# Altium PCB Tigershark 3D R2.2.PcbDoc (part 1 of 4)
Units mil, origin at the board's own origin, x right, y up, seen from the top; angles counter-clockwise.
Board outline 4100 x 4050 mil, 4 copper layers (Top Layer, Groun Plane, Power Plane, Bottom Layer), stack 61.73 mil thick; 359 components, 238 nets, 1141 pads, 830 vias.
Unrouted connection lines stored in the file: 3.
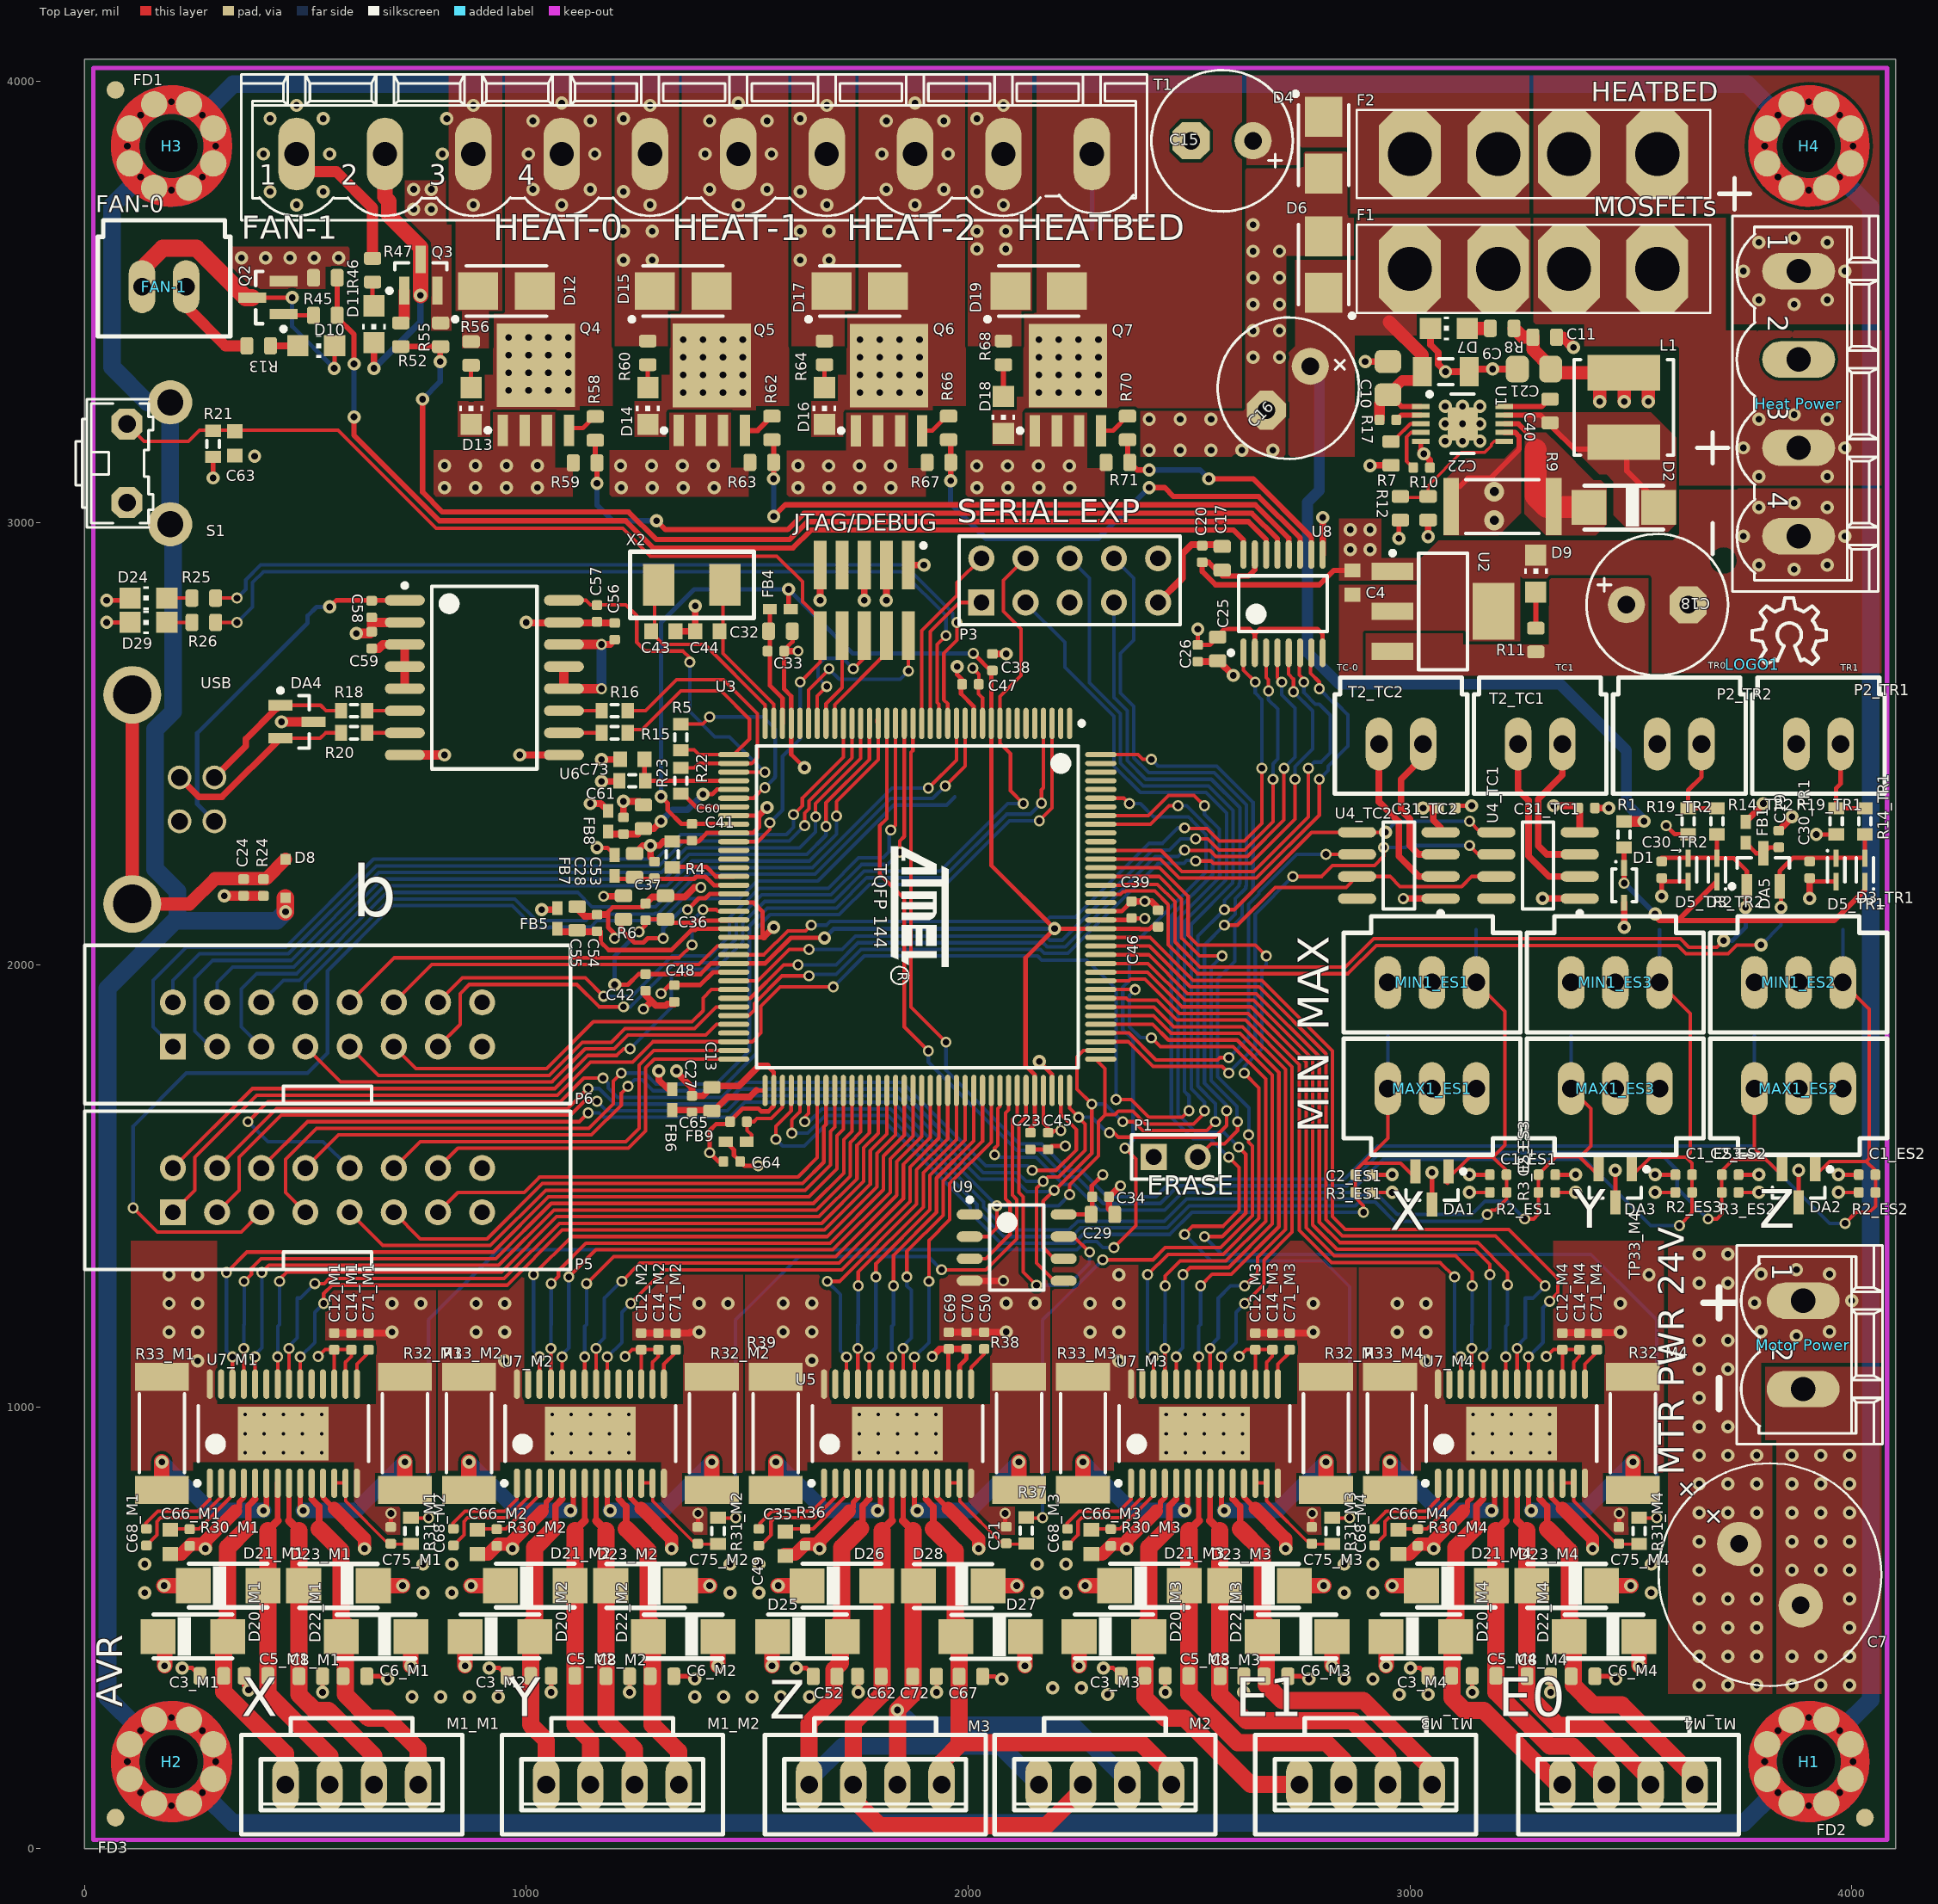
[diagram p0: Top Layer view]
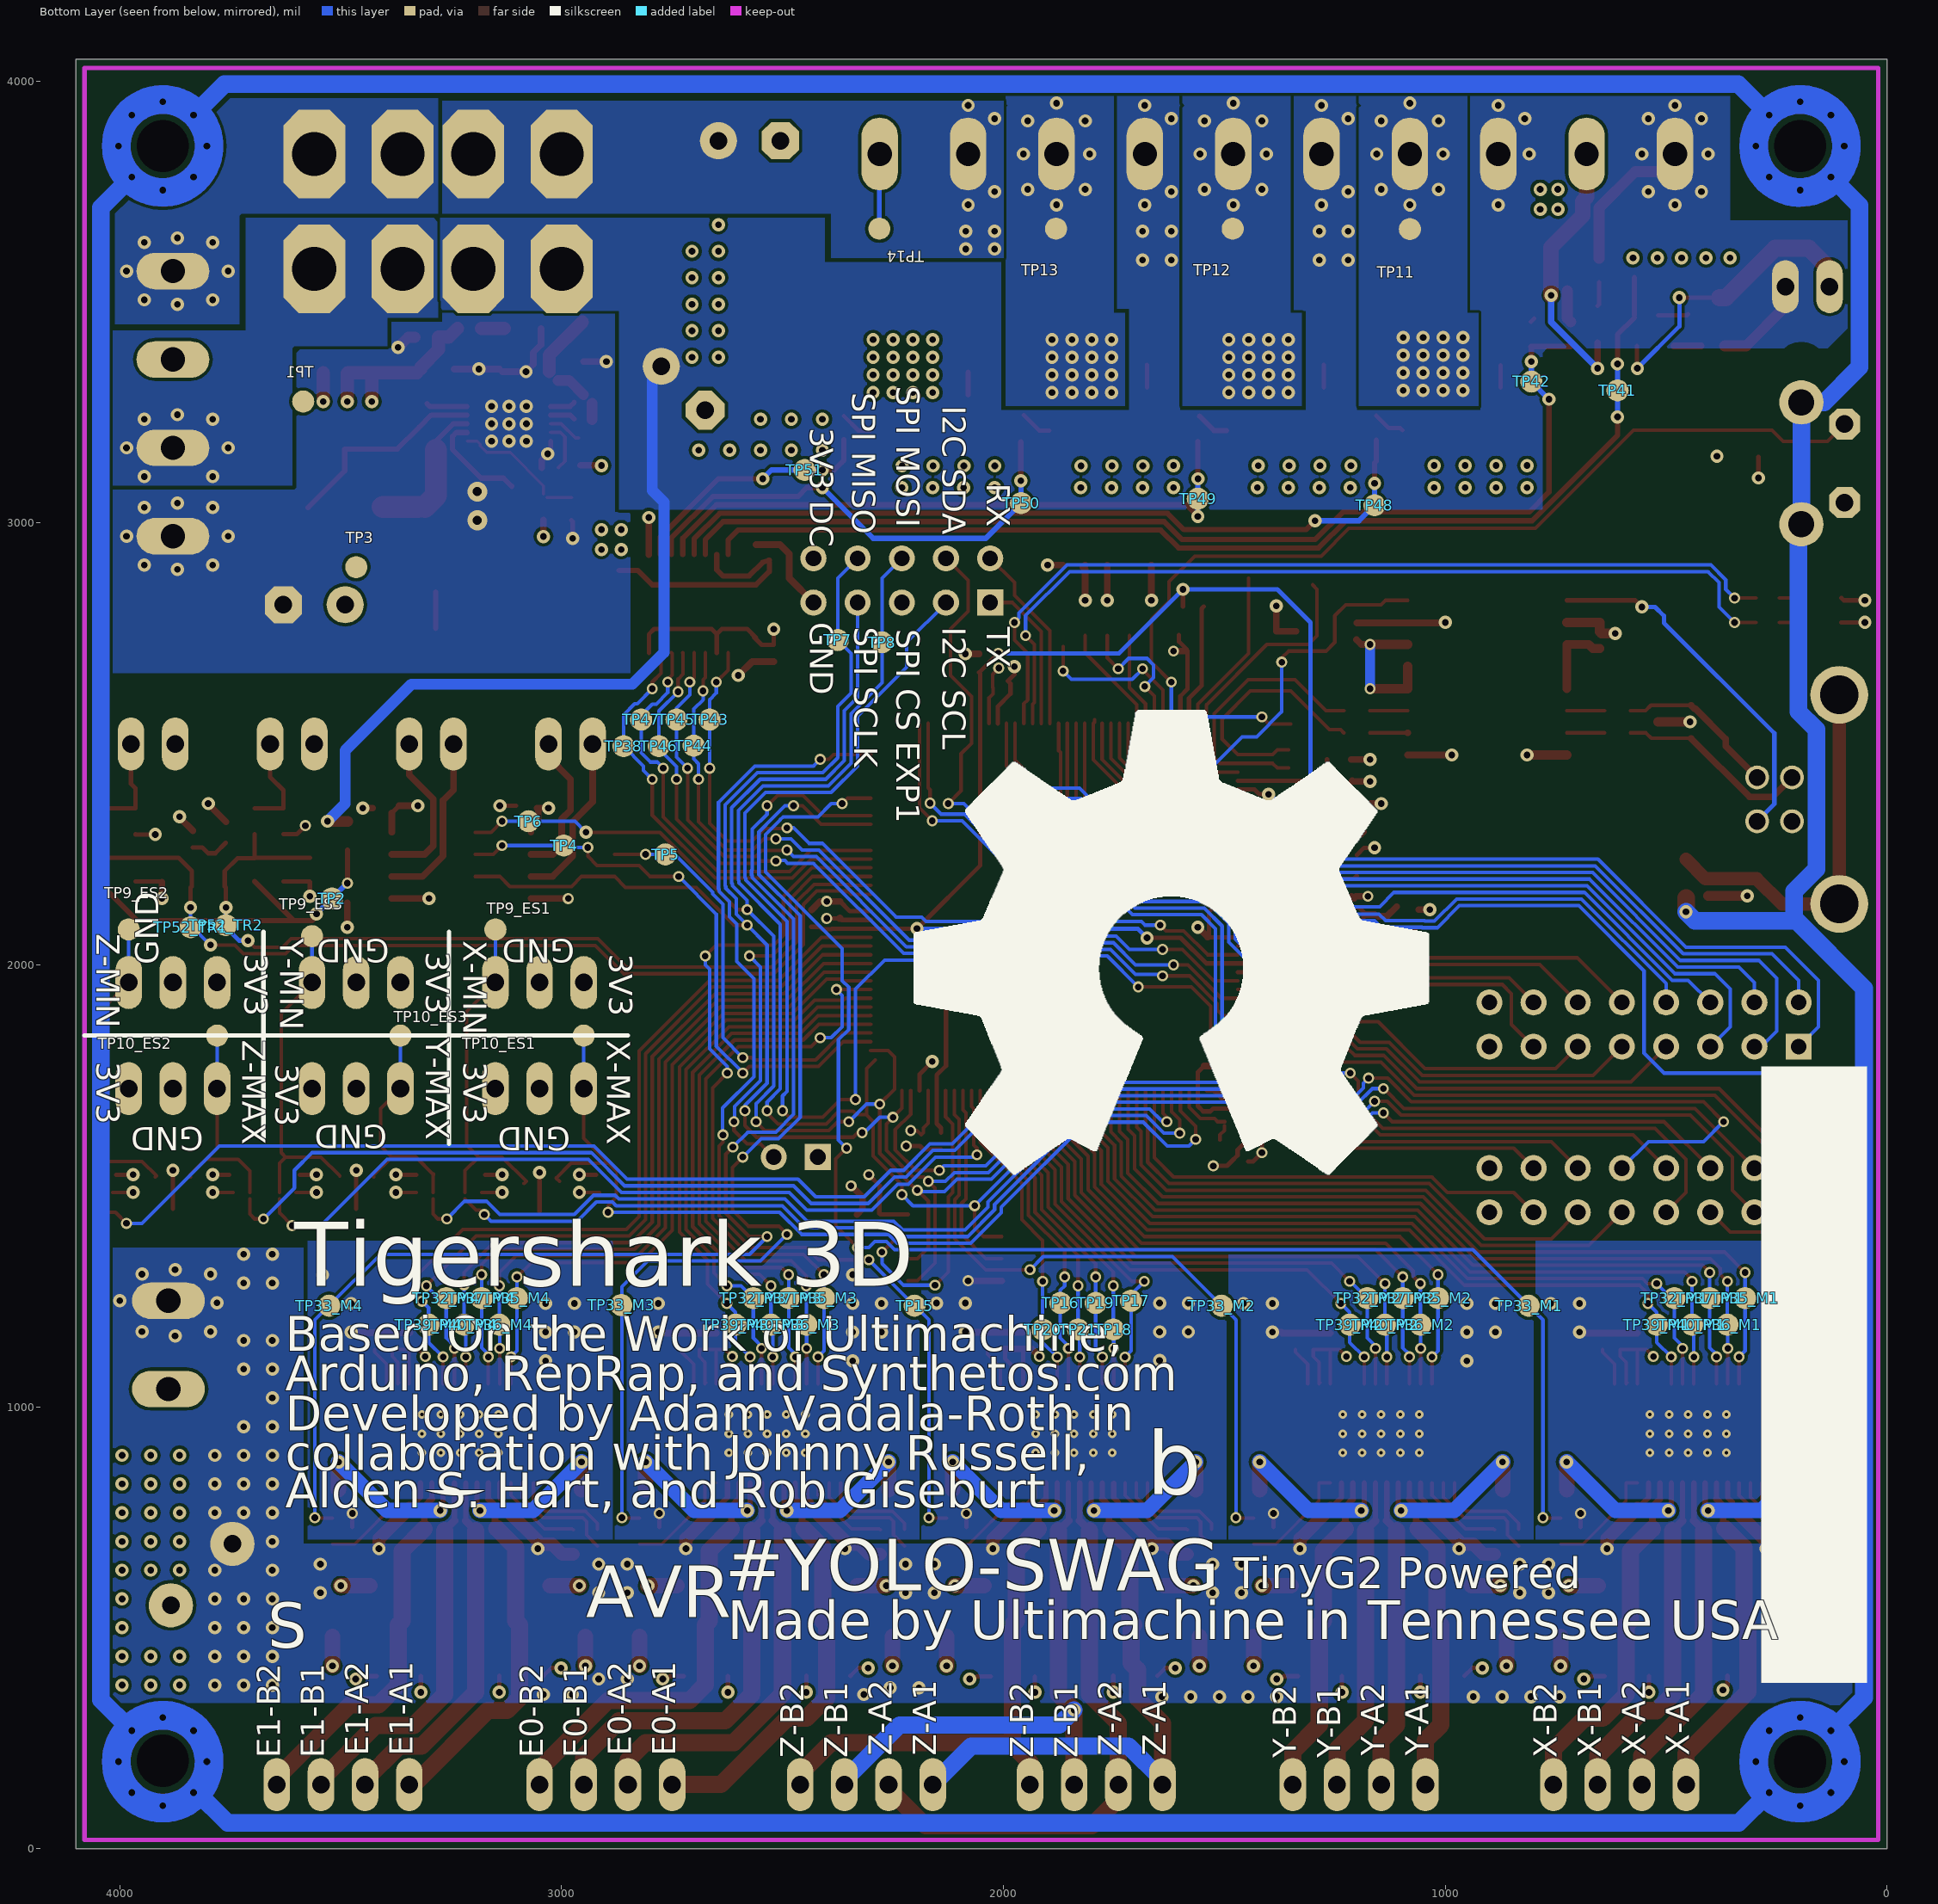
[diagram p1: Bottom Layer view, seen from below]
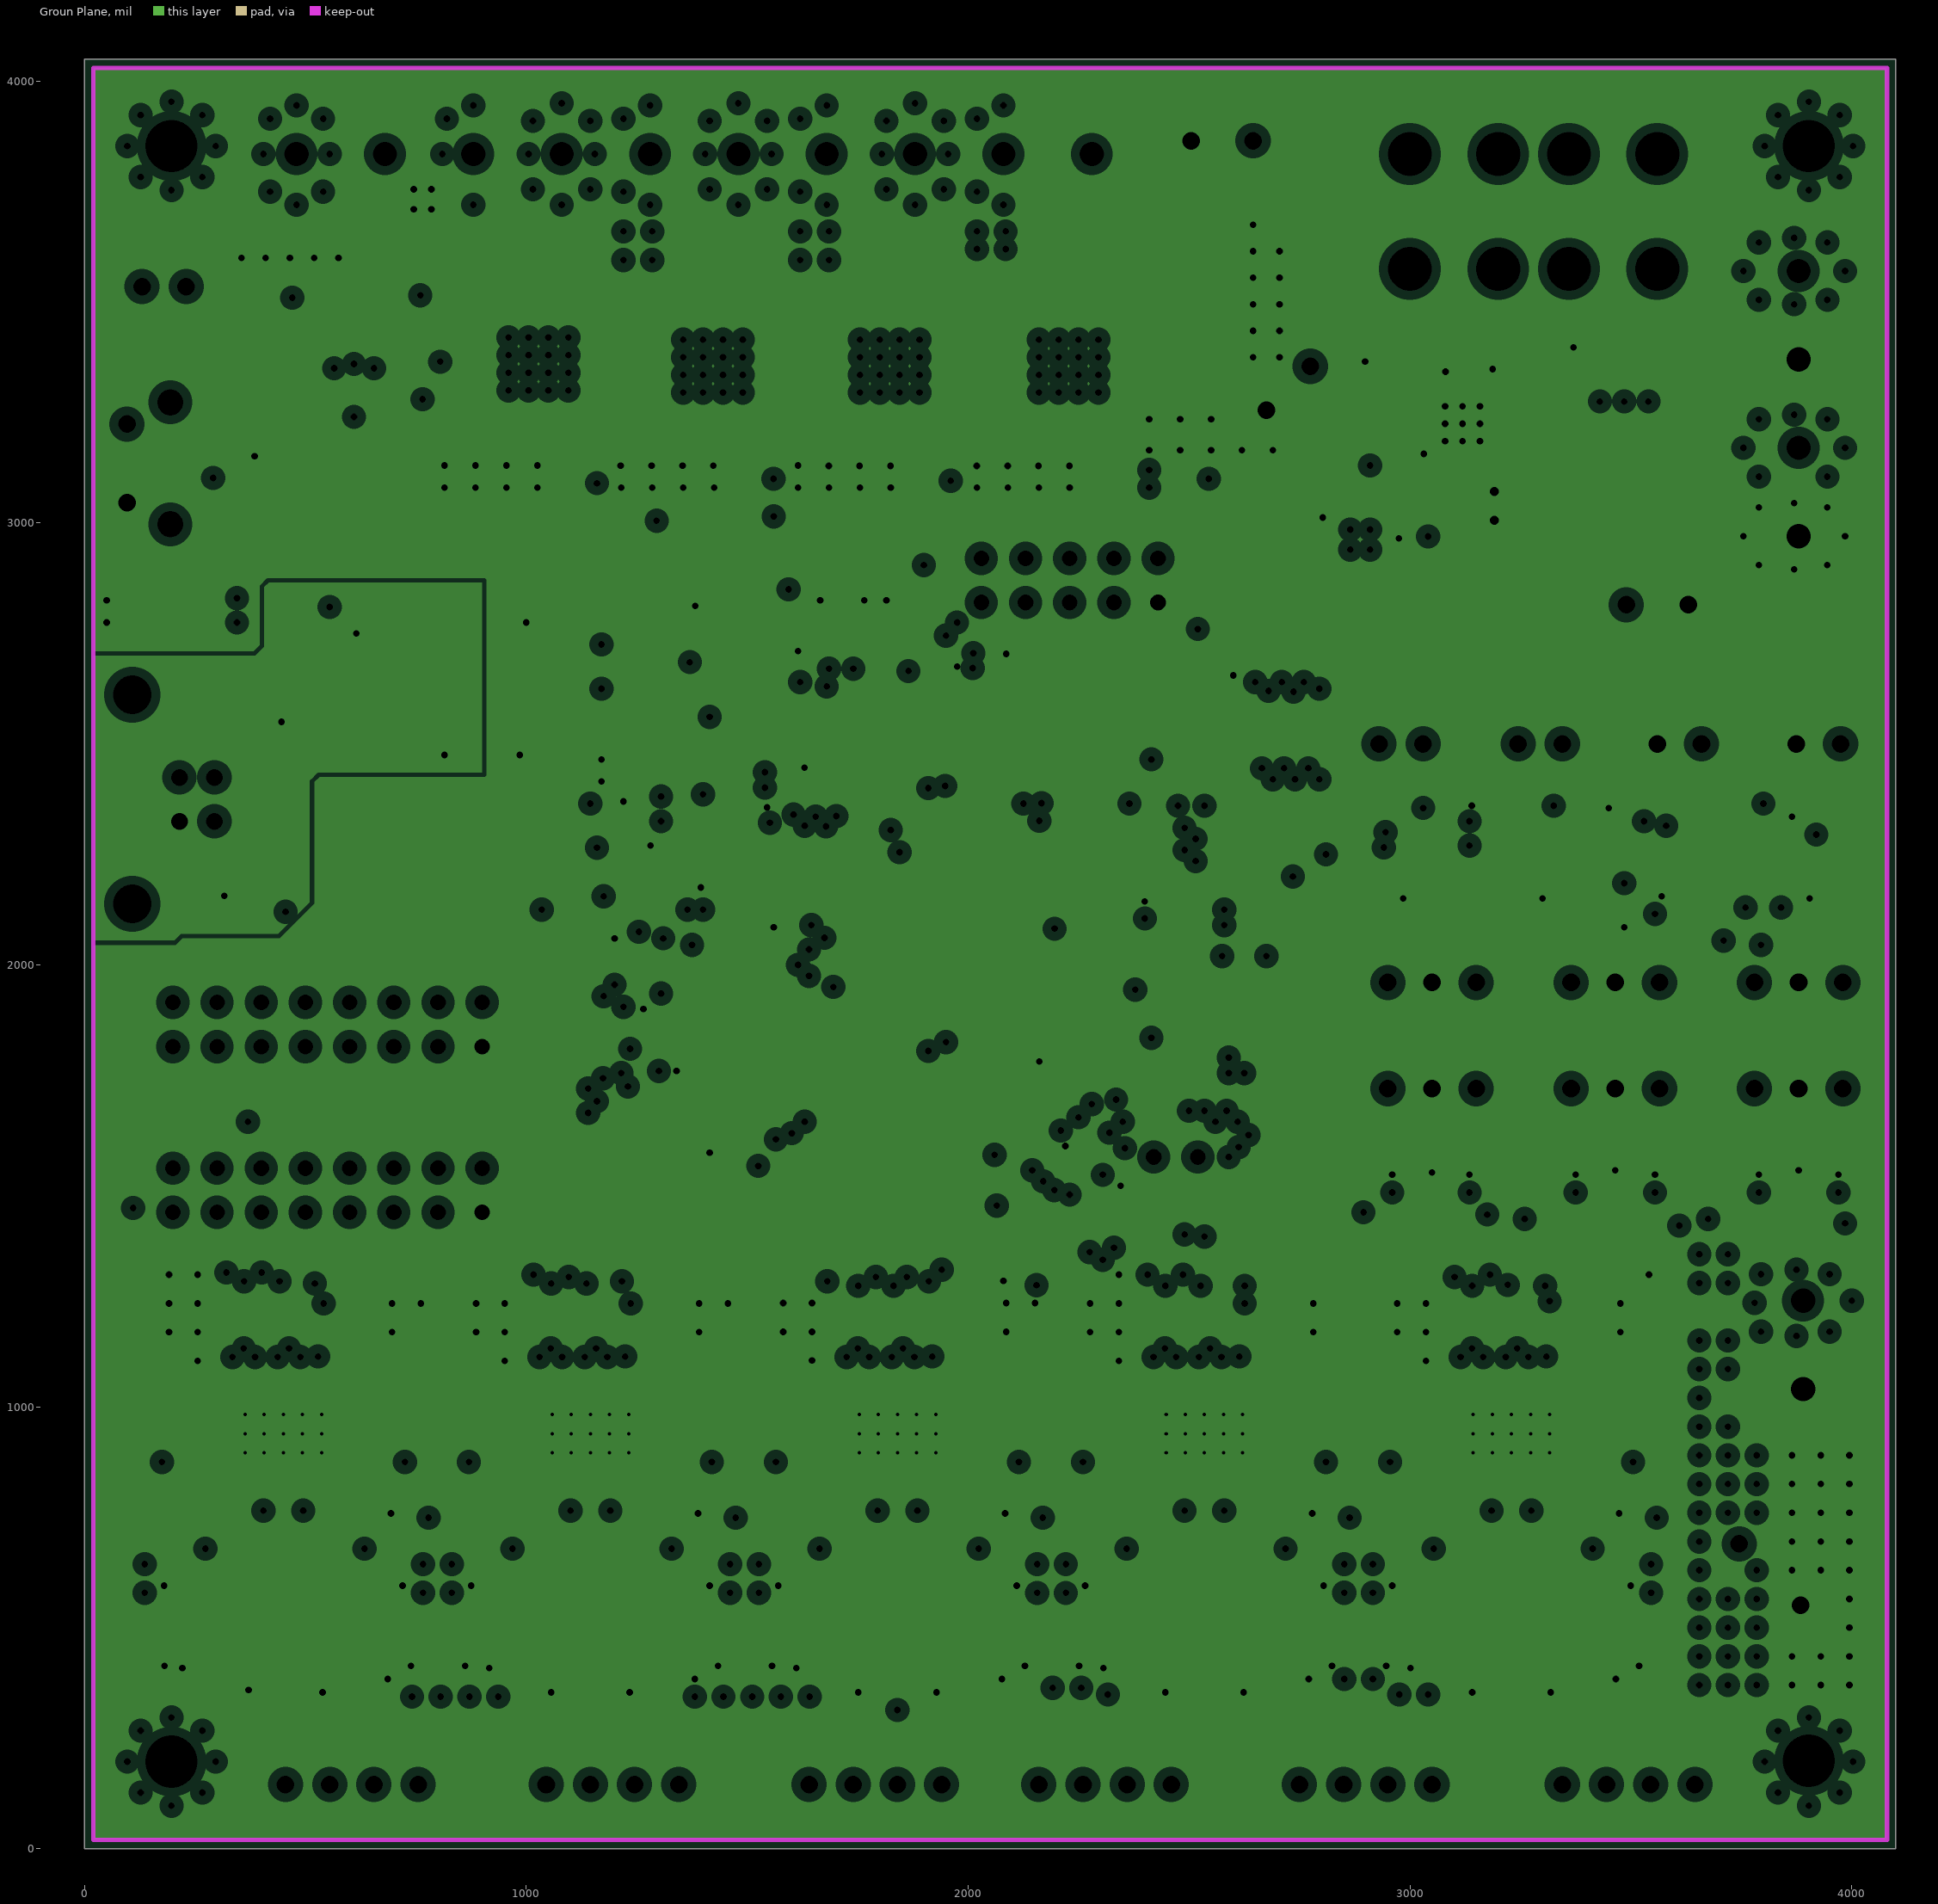
[diagram p2: Groun Plane, clearances drawn from the general rule]
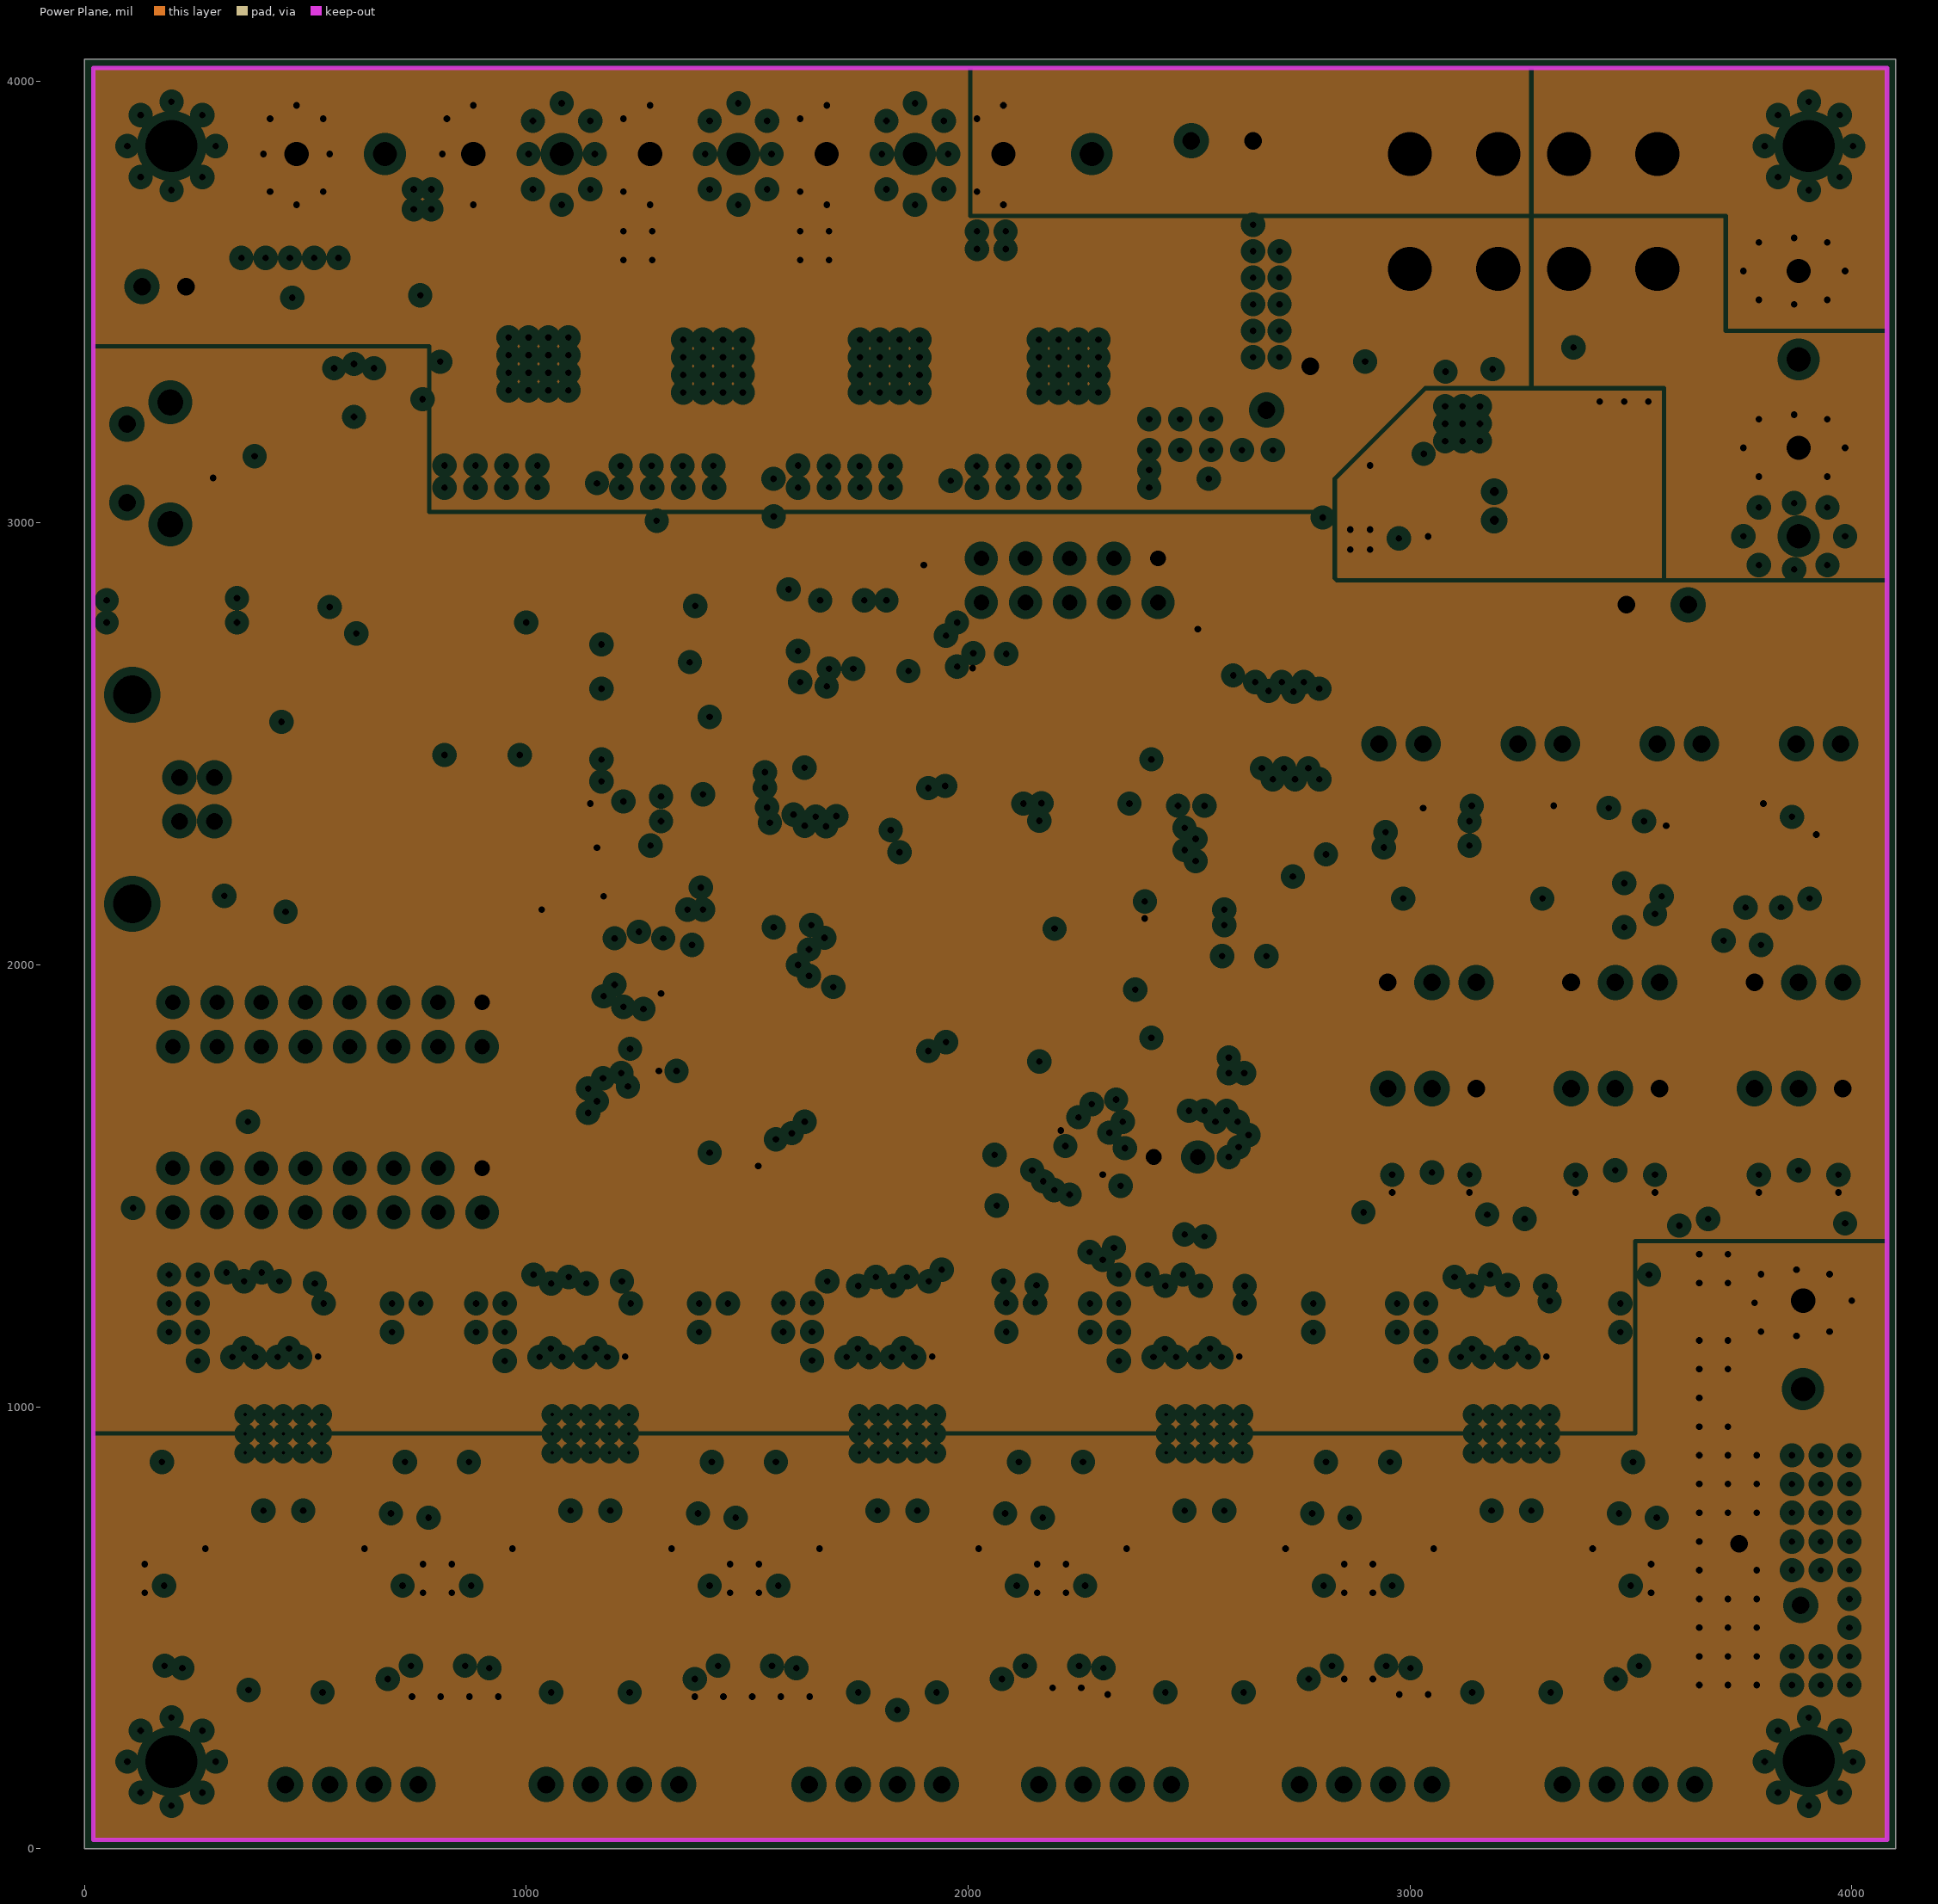
[diagram p3: Power Plane, clearances drawn from the general rule]

## Layer stack, top to bottom
Top Solder: solder mask 0.4, Solder Resist, Dk 3.5
Top Layer: signal copper 2.75
Dielectric1: prepreg 21.654, FR-4, Dk 4.2
Groun Plane: plane copper 1.4, net (Multiple Nets)
Dielectric2: core 10.236, FR-4, Dk 4.2
Power Plane: plane copper 1.4, net (Multiple Nets)
Dielectric3: prepreg 21.54, FR-4, Dk 4.2
Bottom Layer: signal copper 2.75
Bottom Solder: solder mask 0.4, Solder Resist, Dk 3.5

## Board outline
0,0 4100,0 4100,4050 0,4050

## Design rules (kind name [scope] priority, off if disabled: settings)
Clearance [All] p1: gap=7
ComponentClearance [All] p1: gap=0 collisioncheckmode=3 verticalgap=10 showdistances=FALSE
DiffPairsRouting [All] p1: maxlimit=10 minlimit=10 mostfreqgap=10 toplayer_minwidth=15 toplayer_maxwidth=15 toplayer_prefwidth=15 bottomlayer_minwidth=15 bottomlayer_maxwidth=15 bottomlayer_prefwidth=15 maxuncoupledlength=500
FanoutControl Fanout_SOIC [(InComponent('U8') AND InComponent('U7'))] p3: bgadir=Out bgaviamode=Centered fanoutstyle=Staggered fanoutdirection=Alternating viagrid=1 // Fanout_SOIC (Default Rule)
FanoutControl Fanout_Small [All] p4: bgadir=Out bgaviamode=Centered fanoutstyle=Auto fanoutdirection=Alternating viagrid=1 // Fanout_Small (Default Rule)
HoleSize [All] p1: absolutevalues=TRUE maxlimit=200 minlimit=15 maxpercent=80.000 minpercent=20.000
MinimumSolderMaskSliver [All] p1 off: minsoldermaskwidth=10
PlaneClearance [All] p1: clearance=20
PlaneConnect [All] p1: planeconnectstyle=Direct reliefexpansion=20 reliefentries=4 reliefconductorwidth=10 reliefairgap=10
PolygonConnect [All] p1: connectstyle=Direct reliefconductorwidth=45 reliefentries=4 polygonreliefangle="90 Angle" airgapwidth=10
RoutingVias [All] p1: holewidth=15 width=25 viastyle="Through Hole" minholewidth=15 minwidth=25 maxholewidth=28 maxwidth=50
SilkToSilkClearance [All] p1 off: silktosilkclearance=10
SilkToSolderMaskClearance SilkscreenOverComponentPads [IsPad] p1 off: minsilkscreentomaskgap=10 clearancetoexposedcopper=TRUE
SolderMaskExpansion [All] p1: expansion=4
UnpouredPolygon [All] p1: allowunpoured=FALSE
Width [All] p1: maxlimit=200 minlimit=7 preferedwidth=8 minimp=50.000000 maximp=50.000000 favimp=50.000000
19 further rules are at their usual default settings.

## Classes and differential pairs
net class R26_Nets: NetD29_A USB_TX
net class R25_Nets: NetD24_A USB_RX
net class D29_Nets: GND NetD29_A
net class D24_Nets: GND NetD24_A
net class U9_Nets: 3.3VCC GND HOLD# MISO MOSI SCLK SPIFLASH_CS WP#
net class C29_Nets: 3.3VCC GND
net class C34_Nets: 3.3VCC GND
net class P4_Nets: 3.3VCC GND GPIO_P_0 GPIO_P_1 GPIO_P_2 GPIO_P_3 GPIO_P_4 GPIO_P_5 NetP4_1 NetP4_3 NetP4_5
net class H4_Nets: FGND
net class H3_Nets: FGND
net class H2_Nets: FGND
net class H1_Nets: FGND
net class C16_Nets: +12VCC2 GND
net class C18_Nets: 3.3VCC GND
net class C15_Nets: +12VCC3 GND
net class C7_Nets: +12VCC1 GND
net class C14_M4_Nets: 3.3VCC GND
net class C14_M3_Nets: 3.3VCC GND
net class C14_M2_Nets: 3.3VCC GND
net class C14_M1_Nets: 3.3VCC GND
net class C12_M4_Nets: 3.3VCC GND
net class C12_M3_Nets: 3.3VCC GND
net class C12_M2_Nets: 3.3VCC GND
net class C12_M1_Nets: 3.3VCC GND
net class X2_Nets: NetC43_2 NetC44_2
net class USB_Nets: INPUT_GND NetC24_2 NetC58_2 R_N R_P
net class U8_Nets: 3.3VCC +5VCC BED_PWM FET_PWM1 FET_PWM2 FET_PWM3 FET_PWM4 FET_PWM5 GND NetR45_1 NetR52_1 NetR58_1 NetR62_1 NetR66_1 NetR70_1
net class U7_M4_Nets: 3.3VCC +12VCC1 DIR4 EN4 GND MOD0E4 MOD1E4 MOD2E4 NetC3_M4_1 NetC5_M4_1 NetC6_M4_1 NetC8_M4_1 NetC66_M4_2 NetC68_M4_1 NetC68_M4_2 NetC71_M4_2 NetC75_M4_2 NetR32_M4_2 NetR33_M4_2 NetU7_M4_18 NetU7_M4_19 NetU7_M4_27 STEP4
net class U7_M3_Nets: 3.3VCC +12VCC1 DIR3 EN3 GND MOD0E3 MOD1E3 MOD2E3 NetC3_M3_1 NetC5_M3_1 NetC6_M3_1 NetC8_M3_1 NetC66_M3_2 NetC68_M3_1 NetC68_M3_2 NetC71_M3_2 NetC75_M3_2 NetR32_M3_2 NetR33_M3_2 NetU7_M3_18 NetU7_M3_19 NetU7_M3_27 STEP3
net class U7_M2_Nets: 3.3VCC +12VCC1 DIR2 EN2 GND MOD0E2 MOD1E2 MOD2E2 NetC3_M2_1 NetC5_M2_1 NetC6_M2_1 NetC8_M2_1 NetC66_M2_2 NetC68_M2_1 NetC68_M2_2 NetC71_M2_2 NetC75_M2_2 NetR32_M2_2 NetR33_M2_2 NetU7_M2_18 NetU7_M2_19 NetU7_M2_27 STEP2
net class U7_M1_Nets: 3.3VCC +12VCC1 DIR1 EN1 GND MOD0E1 MOD1E1 MOD2E1 NetC3_M1_1 NetC5_M1_1 NetC6_M1_1 NetC8_M1_1 NetC66_M1_2 NetC68_M1_1 NetC68_M1_2 NetC71_M1_2 NetC75_M1_2 NetR32_M1_2 NetR33_M1_2 NetU7_M1_18 NetU7_M1_19 NetU7_M1_27 STEP1
net class U6_Nets: GND INPUT_GND NetC56_2 NetC58_2 NetC59_2 UD_N UD_P UI_N UI_P VBUS
net class U4_TC2_Nets: 3.3VCC GND MISO NetT2_TC2_1 NetT2_TC2_2 NetU4_TC2_8 SCLK TC_CS2
net class U4_TC1_Nets: 3.3VCC GND MISO NetT2_TC1_1 NetT2_TC1_2 NetU4_TC1_8 SCLK TC_CS1
net class U3_Nets: 3.3VCC AVREF BED_PWM DIR1 DIR2 DIR3 DIR4 DIR_EXP1 DIR_EXP2 DIR_Z EN1 EN2 EN3 EN4 EN_EXP1 EN_EXP2 EN_Z ERASE FET_PWM1 FET_PWM2 FET_PWM3 FET_PWM4 FET_PWM5 GND HOLD# I2C_SCL I2C_SDA MAX_ES1 MAX_ES2 MAX_ES3 MCCDZ MCCK MCDZ0 MCDZ1 MCDZ2 MCDZ3 MIN_ES1 MIN_ES2 MIN_ES3 MISO MOD0E1 MOD0E2 MOD0E3 MOD0E4 MOD0E_Z MOD1E1 MOD1E2 MOD1E3 MOD1E4 MOD1E_Z MOD2E1 MOD2E2 MOD2E3 MOD2E4 MOD2E_Z MODE0_EXP1 MODE0_EXP2 MODE1_EXP1 MODE1_EXP2 MODE2_EXP1 MODE2_EXP2 MOSI NetC43_2 NetC44_2 NetC73_2 NetR4_1 NetR5_2 NetR6_1 NetR22_2 NetU3_32 NetU3_48 NetU3_127 NetU3_136 NetU3_137 NetU3_138 NRST REF1 REF2 REF3 REF4 REF_EXP1 REF_EXP2 REF_Z RESET RXD0 RXD1 SCLK SHDN STEP1 STEP2 STEP3 STEP4 STEP_EXP1 STEP_EXP2 STEP_Z TC_CS1 TC_CS2 TCK/SWDCLK TDI TDO/SWO THERM_AN1 THERM_AN2 TMS/SWDIO TXD0 TXD1 UMCU_N UMCU_P USB_RX USB_TX VBUS VDDANA VDDBU VDDIN VDDOUT VDDPLL VDDUTMI WP# XIN32 XOUT32
net class U2_Nets: 3.3VCC +5VCC GND
net class U1_Nets: +12VCC2 GND NetC22_1 NetC40_1 NetC40_2 NetD2_A NetR7_1 NetR10_2 NetR17_1
net class TP52_TR2_Nets: THERM_AN2
net class TP52_TR1_Nets: THERM_AN1
net class TP51_Nets: NetR70_1
net class TP50_Nets: NetR66_1
net class TP49_Nets: NetR62_1
net class TP48_Nets: NetR58_1
net class TP47_Nets: FET_PWM5
net class TP46_Nets: FET_PWM4
net class TP45_Nets: FET_PWM3
net class TP44_Nets: FET_PWM2
net class TP43_Nets: FET_PWM1
net class TP42_Nets: NetR52_1
net class TP41_Nets: NetR45_1
net class TP40_M4_Nets: STEP4
net class TP40_M3_Nets: STEP3
net class TP40_M2_Nets: STEP2
net class TP40_M1_Nets: STEP1
net class TP39_M4_Nets: DIR4
net class TP39_M3_Nets: DIR3
net class TP39_M2_Nets: DIR2
net class TP39_M1_Nets: DIR1
net class TP38_Nets: BED_PWM
net class TP37_M4_Nets: MOD0E4
net class TP37_M3_Nets: MOD0E3
net class TP37_M2_Nets: MOD0E2
net class TP37_M1_Nets: MOD0E1
net class TP36_M4_Nets: MOD1E4
net class TP36_M3_Nets: MOD1E3
net class TP36_M2_Nets: MOD1E2
net class TP36_M1_Nets: MOD1E1
net class TP35_M4_Nets: MOD2E4
net class TP35_M3_Nets: MOD2E3
net class TP35_M2_Nets: MOD2E2
net class TP35_M1_Nets: MOD2E1
net class TP33_M4_Nets: REF4
net class TP33_M3_Nets: REF3
net class TP33_M2_Nets: REF2
net class TP33_M1_Nets: REF1
net class TP32_M4_Nets: EN4
net class TP32_M3_Nets: EN3
net class TP32_M2_Nets: EN2
net class TP32_M1_Nets: EN1
net class TP14_Nets: NetD18_C
net class TP13_Nets: NetD16_C
net class TP12_Nets: NetD14_C
net class TP11_Nets: NetD12_1
net class TP10_ES3_Nets: MAX_ES3
net class TP10_ES2_Nets: MAX_ES2
net class TP10_ES1_Nets: MAX_ES1
net class TP9_ES3_Nets: MIN_ES3
net class TP9_ES2_Nets: MIN_ES2
net class TP9_ES1_Nets: MIN_ES1
net class TP8_Nets: MOSI
net class TP7_Nets: MISO
net class TP6_Nets: SCLK
net class TP5_Nets: TC_CS2
net class TP4_Nets: TC_CS1
net class TP3_Nets: 3.3VCC
net class TP2_Nets: OVREF
net class TP1_Nets: +5VCC
net class T2_TC2_Nets: NetT2_TC2_1 NetT2_TC2_2
net class T2_TC1_Nets: NetT2_TC1_1 NetT2_TC1_2
net class T1_Nets: +12VCC2 +12VCC3 NetD11_C NetD12_1 NetD14_C NetD16_C NetD18_C
net class S1_Nets: FGND GND NetS1_3 NetS1_4 RESET
net class R71_Nets: GND NetR70_1
net class R70_Nets: NetQ7_4 NetR70_1
net class R68_Nets: +12VCC3 NetD18_A
net class R67_Nets: GND NetR66_1
net class R66_Nets: NetQ6_4 NetR66_1
net class R64_Nets: +12VCC2 NetD16_A
net class R63_Nets: GND NetR62_1
net class R62_Nets: NetQ5_4 NetR62_1
net class R60_Nets: +12VCC2 NetD14_A
net class R59_Nets: GND NetR58_1
net class R58_Nets: NetQ4_4 NetR58_1
net class R56_Nets: +12VCC2 NetD13_A
net class R55_Nets: GND NetR52_1
net class R52_Nets: NetQ3_1 NetR52_1
net class R47_Nets: +12VCC2 NetD11_A
net class R46_Nets: GND NetR45_1
net class R45_Nets: NetQ2_1 NetR45_1
net class R33_M4_Nets: GND NetR33_M4_2
net class R33_M3_Nets: GND NetR33_M3_2
net class R33_M2_Nets: GND NetR33_M2_2
net class R33_M1_Nets: GND NetR33_M1_2
net class R32_M4_Nets: GND NetR32_M4_2
net class R32_M3_Nets: GND NetR32_M3_2
net class R32_M2_Nets: GND NetR32_M2_2
net class R32_M1_Nets: GND NetR32_M1_2
net class R31_M4_Nets: NetC75_M4_2 REF4
net class R31_M3_Nets: NetC75_M3_2 REF3
net class R31_M2_Nets: NetC75_M2_2 REF2
net class R31_M1_Nets: NetC75_M1_2 REF1
net class R30_M4_Nets: +12VCC1 NetC66_M4_2
net class R30_M3_Nets: +12VCC1 NetC66_M3_2
net class R30_M2_Nets: +12VCC1 NetC66_M2_2
net class R30_M1_Nets: +12VCC1 NetC66_M1_2
net class R23_Nets: GND NetC73_2
net class R22_Nets: NetR22_2 UMCU_N
net class R21_Nets: 3.3VCC RESET
net class R20_Nets: R_P UD_P
net class R19_TR2_Nets: 3.3VCC NetP2_TR2_1
net class R19_TR1_Nets: 3.3VCC NetP2_TR1_1
net class R18_Nets: R_N UD_N
net class R17_Nets: +12VCC2 NetR17_1
net class R16_Nets: UI_N UMCU_N
net class R15_Nets: UI_P UMCU_P
net class R14_TR2_Nets: NetP2_TR2_1 THERM_AN2
net class R14_TR1_Nets: NetP2_TR1_1 THERM_AN1
net class R13_Nets: +12VCC2 NetD10_A
net class R12_Nets: GND NetR10_2
net class R11_Nets: 3.3VCC NetD9_A
net class R10_Nets: +5VCC NetR10_2
net class R9_Nets: GND NetD2_A
net class R8_Nets: +5VCC NetD7_A
net class R7_Nets: +5VCC NetR7_1
net class R6_Nets: 3.3VCC NetR6_1
net class R5_Nets: NetR5_2 UMCU_P
net class R4_Nets: GND NetR4_1
net class R3_ES3_Nets: 3.3VCC MAX_ES3
net class R3_ES2_Nets: 3.3VCC MAX_ES2
net class R3_ES1_Nets: 3.3VCC MAX_ES1
net class R2_ES3_Nets: 3.3VCC MIN_ES3
net class R2_ES2_Nets: 3.3VCC MIN_ES2
net class R2_ES1_Nets: 3.3VCC MIN_ES1
net class R1_Nets: +12VCC2 OVREF
net class Q7_Nets: GND NetD18_C NetQ7_4
net class Q6_Nets: GND NetD16_C NetQ6_4
net class Q5_Nets: GND NetD14_C NetQ5_4
net class Q4_Nets: GND NetD12_1 NetQ4_4
net class Q3_Nets: GND NetD11_C NetQ3_1
net class Q2_Nets: GND NetD10_C NetQ2_1
net class P2_TR2_Nets: GND NetP2_TR2_1
net class P2_TR1_Nets: GND NetP2_TR1_1
net class P1_Nets: 3.3VCC ERASE
net class "Motor Power_Nets": +12VCC1 GND
net class MIN1_ES3_Nets: 3.3VCC GND MIN_ES3
net class MIN1_ES2_Nets: 3.3VCC GND MIN_ES2
net class MIN1_ES1_Nets: 3.3VCC GND MIN_ES1
net class MAX1_ES3_Nets: 3.3VCC GND MAX_ES3
net class MAX1_ES2_Nets: 3.3VCC GND MAX_ES2
net class MAX1_ES1_Nets: 3.3VCC GND MAX_ES1
net class M1_M4_Nets: NetC3_M4_1 NetC5_M4_1 NetC6_M4_1 NetC8_M4_1
net class M1_M3_Nets: NetC3_M3_1 NetC5_M3_1 NetC6_M3_1 NetC8_M3_1
net class M1_M2_Nets: NetC3_M2_1 NetC5_M2_1 NetC6_M2_1 NetC8_M2_1
net class M1_M1_Nets: NetC3_M1_1 NetC5_M1_1 NetC6_M1_1 NetC8_M1_1
net class L1_Nets: +5VCC NetC40_2
net class JTAG/DEBUG_Nets: 3.3VCC GND NetJTAG/DEBUG_7 RESET TCK/SWDCLK TDI TDO/SWO TMS/SWDIO
net class "Heat Power_Nets": GND NetF1_1 NetF2_1
net class FB9_Nets: 3.3VCC AVREF
net class FB8_Nets: 3.3VCC VDDUTMI
net class FB7_Nets: 3.3VCC VDDBU
net class FB6_Nets: 3.3VCC VDDANA
net class FB5_Nets: 3.3VCC VDDIN
net class FB4_Nets: VDDOUT VDDPLL
net class FAN-1_Nets: +12VCC2 NetD10_C
net class F2_Nets: +12VCC3 NetF2_1
net class F1_Nets: +12VCC2 NetF1_1
net class DA5_Nets: NetC19_2 THERM_AN1 THERM_AN2
net class DA4_Nets: INPUT_GND R_N R_P
net class DA3_Nets: GND MAX_ES3 MIN_ES3
net class DA2_Nets: GND MAX_ES2 MIN_ES2
net class DA1_Nets: GND MAX_ES1 MIN_ES1
net class D23_M4_Nets: GND NetC8_M4_1
net class D23_M3_Nets: GND NetC8_M3_1
net class D23_M2_Nets: GND NetC8_M2_1
net class D23_M1_Nets: GND NetC8_M1_1
net class D22_M4_Nets: GND NetC6_M4_1
net class D22_M3_Nets: GND NetC6_M3_1
net class D22_M2_Nets: GND NetC6_M2_1
net class D22_M1_Nets: GND NetC6_M1_1
net class D21_M4_Nets: GND NetC5_M4_1
net class D21_M3_Nets: GND NetC5_M3_1
net class D21_M2_Nets: GND NetC5_M2_1
net class D21_M1_Nets: GND NetC5_M1_1
net class D20_M4_Nets: GND NetC3_M4_1
net class D20_M3_Nets: GND NetC3_M3_1
net class D20_M2_Nets: GND NetC3_M2_1
net class D20_M1_Nets: GND NetC3_M1_1
net class D19_Nets: +12VCC3 NetD18_C
net class D18_Nets: NetD18_A NetD18_C
net class D17_Nets: +12VCC2 NetD16_C
net class D16_Nets: NetD16_A NetD16_C
net class D15_Nets: +12VCC2 NetD14_C
net class D14_Nets: NetD14_A NetD14_C
net class D13_Nets: NetD12_1 NetD13_A
net class D12_Nets: +12VCC2 NetD12_1
net class D11_Nets: NetD11_A NetD11_C
net class D10_Nets: NetD10_A NetD10_C
net class D9_Nets: GND NetD9_A
net class D7_Nets: GND NetD7_A
net class D6_Nets: +12VCC2 GND
net class D5_TR2_Nets: GND THERM_AN2
net class D5_TR1_Nets: GND THERM_AN1
net class D4_Nets: +12VCC3 GND
net class D3_TR2_Nets: OVREF THERM_AN2
net class D3_TR1_Nets: OVREF THERM_AN1
net class D2_Nets: NetC40_2 NetD2_A
net class D1_Nets: GND OVREF
net class C75_M4_Nets: GND NetC75_M4_2
net class C75_M3_Nets: GND NetC75_M3_2
net class C75_M2_Nets: GND NetC75_M2_2
net class C75_M1_Nets: GND NetC75_M1_2
net class C73_Nets: GND NetC73_2
net class C71_M4_Nets: GND NetC71_M4_2
net class C71_M3_Nets: GND NetC71_M3_2
net class C71_M2_Nets: GND NetC71_M2_2
net class C71_M1_Nets: GND NetC71_M1_2
net class C68_M4_Nets: NetC68_M4_1 NetC68_M4_2
net class C68_M3_Nets: NetC68_M3_1 NetC68_M3_2
net class C68_M2_Nets: NetC68_M2_1 NetC68_M2_2
net class C68_M1_Nets: NetC68_M1_1 NetC68_M1_2
net class C66_M4_Nets: +12VCC1 NetC66_M4_2
net class C66_M3_Nets: +12VCC1 NetC66_M3_2
net class C66_M2_Nets: +12VCC1 NetC66_M2_2
net class C66_M1_Nets: +12VCC1 NetC66_M1_2
net class C65_Nets: AVREF GND
net class C64_Nets: 3.3VCC GND
net class C63_Nets: GND RESET
net class C61_Nets: GND VDDUTMI
net class C60_Nets: GND VDDUTMI
net class C59_Nets: INPUT_GND NetC59_2
net class C58_Nets: INPUT_GND NetC58_2
net class C57_Nets: GND VBUS
net class C56_Nets: GND NetC56_2
net class C55_Nets: GND VDDIN
net class C54_Nets: GND VDDIN
net class C53_Nets: GND VDDBU
net class C48_Nets: 3.3VCC GND
net class C47_Nets: 3.3VCC GND
net class C46_Nets: 3.3VCC GND
net class C45_Nets: 3.3VCC GND
net class C44_Nets: GND NetC44_2
net class C43_Nets: GND NetC43_2
net class C42_Nets: GND VDDOUT
net class C41_Nets: GND VDDOUT
net class C40_Nets: NetC40_1 NetC40_2
net class C39_Nets: GND VDDOUT
net class C38_Nets: GND VDDOUT
net class C37_Nets: GND VDDOUT
net class C36_Nets: GND VDDOUT
net class C33_Nets: GND VDDPLL
net class C32_Nets: GND VDDPLL
net class C31_TC2_Nets: 3.3VCC GND
net class C31_TC1_Nets: 3.3VCC GND
net class C30_TR2_Nets: GND THERM_AN2
net class C30_TR1_Nets: GND THERM_AN1
net class C28_Nets: GND VDDBU
net class C27_Nets: GND VDDANA
net class C26_Nets: 3.3VCC GND
net class C25_Nets: 3.3VCC GND
net class C23_Nets: GND VDDOUT
net class C22_Nets: GND NetC22_1
net class C21_Nets: +5VCC GND
net class C20_Nets: +5VCC GND
net class C17_Nets: +5VCC GND
net class C13_Nets: GND VDDANA
net class C11_Nets: +5VCC GND
net class C10_Nets: +12VCC2 GND
net class C9_Nets: +12VCC2 GND
net class C8_M4_Nets: GND NetC8_M4_1
net class C8_M3_Nets: GND NetC8_M3_1
net class C8_M2_Nets: GND NetC8_M2_1
net class C8_M1_Nets: GND NetC8_M1_1
net class C6_M4_Nets: GND NetC6_M4_1
net class C6_M3_Nets: GND NetC6_M3_1
net class C6_M2_Nets: GND NetC6_M2_1
net class C6_M1_Nets: GND NetC6_M1_1
net class C5_M4_Nets: GND NetC5_M4_1
net class C5_M3_Nets: GND NetC5_M3_1
net class C5_M2_Nets: GND NetC5_M2_1
net class C5_M1_Nets: GND NetC5_M1_1
net class C4_Nets: +5VCC GND
net class C3_M4_Nets: GND NetC3_M4_1
net class C3_M3_Nets: GND NetC3_M3_1
net class C3_M2_Nets: GND NetC3_M2_1
net class C3_M1_Nets: GND NetC3_M1_1
net class C2_ES3_Nets: GND MAX_ES3
net class C2_ES2_Nets: GND MAX_ES2
net class C2_ES1_Nets: GND MAX_ES1
net class C1_ES3_Nets: GND MIN_ES3
net class C1_ES2_Nets: GND MIN_ES2
net class C1_ES1_Nets: GND MIN_ES1
component class "U_MOSFETs and Driver": C17 C20 C25 C26 D10 D11 D12 D13 D14 D15 D16 D17 D18 D19 FAN-1 Q2 Q3 Q4 Q5 Q6 Q7 R13 R45 R46 R47 R52 R55 R56 R58 R59 R60 R62 R63 R64 R66 R67 R68 R70 R71 T1 TP11 TP12 TP13 TP14 TP38 TP41 TP42 TP43 TP44 TP45 TP46 TP47 TP48 TP49 TP50 TP51 U8
component class TC2: C31_TC2 T2_TC2 U4_TC2 U4_ThermocoupleChannel2
component class TC1: C31_TC1 T2_TC1 U4_TC1 U4_ThermocoupleChannel1
component class ES3: C1_ES3 C2_ES3 MAX1_ES3 MIN1_ES3 R2_ES3 R3_ES3 TP9_ES3 TP10_ES3
component class ES2: C1_ES2 C2_ES2 MAX1_ES2 MIN1_ES2 R2_ES2 R3_ES2 TP9_ES2 TP10_ES2
component class ES1: C1_ES1 C2_ES1 MAX1_ES1 MIN1_ES1 R2_ES1 R3_ES1 TP9_ES1 TP10_ES1
component class U_MZ: C35 C49 C50 C51 C52 C62 C67 C69 C70 C72 D25 D26 D27 D28 M2 M3 R32_DriverChannelDRV88255 R33_DriverChannelDRV88255 R36 R37 R38 R39 TP15 TP16 TP17 TP18 TP19 TP20 TP21 U5
component class M4: C3_M4 C5_M4 C6_M4 C8_M4 C12_M4 C14_M4 C66_M4 C68_M4 C71_M4 C75_M4 D20_M4 D21_M4 D22_M4 D23_M4 M1_M4 R30_M4 R31_M4 R32_DriverChannelDRV88254 R32_M4 R33_DriverChannelDRV88254 R33_M4 TP32_M4 TP33_M4 TP35_M4 TP36_M4 TP37_M4 TP39_M4 TP40_M4 U7_M4
component class M3: C3_M3 C5_M3 C6_M3 C8_M3 C12_M3 C14_M3 C66_M3 C68_M3 C71_M3 C75_M3 D20_M3 D21_M3 D22_M3 D23_M3 M1_M3 R30_M3 R31_M3 R32_DriverChannelDRV88253 R32_M3 R33_DriverChannelDRV88253 R33_M3 TP32_M3 TP33_M3 TP35_M3 TP36_M3 TP37_M3 TP39_M3 TP40_M3 U7_M3
component class M2: C3_M2 C5_M2 C6_M2 C8_M2 C12_M2 C14_M2 C66_M2 C68_M2 C71_M2 C75_M2 D20_M2 D21_M2 D22_M2 D23_M2 M1_M2 R30_M2 R31_M2 R32_DriverChannelDRV88252 R32_M2 R33_DriverChannelDRV88252 R33_M2 TP32_M2 TP33_M2 TP35_M2 TP36_M2 TP37_M2 TP39_M2 TP40_M2 U7_M2
component class M1: C3_M1 C5_M1 C6_M1 C8_M1 C12_M1 C14_M1 C66_M1 C68_M1 C71_M1 C75_M1 D20_M1 D21_M1 D22_M1 D23_M1 M1_M1 R30_M1 R31_M1 R32_DriverChannelDRV88251 R32_M1 R33_DriverChannelDRV88251 R33_M1 TP32_M1 TP33_M1 TP35_M1 TP36_M1 TP37_M1 TP39_M1 TP40_M1 U7_M1
component class "ATSAM3X8E Main Controller": C13 C19 C23 C24 C27 C28 C29 C32 C33 C34 C36 C37 C38 C39 C41 C42 C43 C44 C45 C46 C47 C48 C53 C54 C55 C56 C57 C58 C59 C60 C61 C63 C64 C65 C73 D8 D24 D29 DA1 DA2 DA3 DA4 DA5 FB1 FB4 FB5 FB6 FB7 FB8 FB9 FD1 FD2 FD3 JTAG/DEBUG LOGO1 microSD P1 P3 P5 P6 R4 R5 R6 R15 R16 R18 R20 R21 R22 R23 R24 R25 R26 S1 TP4 TP5 TP6 TP7 TP8 U3 U6 U9 USB X2
component class Designator: C4 C7 C9 C10 C11 C15 C16 C18 C21 C22 C40 D1 D2 D4 D6 D7 D9 F1 F2 H1 H2 H3 H4 "Heat Power" L1 "Motor Power" R1 R7 R8 R9 R10 R11 R12 R17 TP1 TP2 TP3 U1 U2
net class MAX_ES_BUS[1..3]: MAX_ES0
net class MIN_ES_BUS[1..3]: MIN_ES0
net class MISO[1..2]: MISO0 MISO1 MISO2
net class SCLK[1..2]: SCLK0 SCLK1 SCLK2
net class TC_CS_BUS[1..2]: TC_CS0
net class THERM_AN_BUS[1..2]: THERM_AN0
component class TR1: C30_ThermistorChannel1 C30_TR1 D3_ThermistorChannel1 D3_TR1 D5_ThermistorChannel1 D5_TR1 P2_TR1 R14_TR1 R19_ThermistorChannel1 R19_TR1 TP52_TR1
component class TR2: C30_TR2 D3_ThermistorChannel2 D3_TR2 D5_ThermistorChannel2 D5_TR2 P2_TR2 R14_TR2 R19_ThermistorChannel2 R19_TR2 TP52_TR2
channel class ES: ES1 ES2 ES3
channel class M: M1 M2 M3 M4 M5
channel class TC: TC1 TC2
channel class TR: TR1 TR2
net class C19_Nets: GND NetC19_2
net class FB1_Nets: 3.3VCC NetC19_2
net class C24_Nets: INPUT_GND NetC24_2
net class D8_Nets: FGND NetC24_2
net class R24_Nets: INPUT_GND NetC24_2
net class P3_Nets: 3.3VCC EXP_CS GND I2C_SCL I2C_SDA MISO MOSI NetP3_1 NetP3_3 NetP3_5 NetP3_7 RXD1 SCLK TXD1
net class U5_Nets: 3.3VCC +12VCC1 DIR_Z EN_Z GND MOD0E_Z MOD1E_Z MOD2E_Z NetC35_2 NetC49_1 NetC49_2 NetC50_2 NetC51_2 NetC52_1 NetC62_1 NetC67_1 NetC72_1 NetR38_2 NetR39_2 NetU7_M5_18 NetU7_M5_19 NetU7_M5_27 STEP_Z
net class C69_Nets: 3.3VCC GND
net class C35_Nets: +12VCC1 NetC35_2
net class C49_Nets: NetC49_1 NetC49_2
net class C50_Nets: GND NetC50_2
net class C51_Nets: GND NetC51_2
net class C52_Nets: GND NetC52_1
net class C62_Nets: GND NetC62_1
net class C67_Nets: GND NetC67_1
net class C70_Nets: 3.3VCC GND
net class C72_Nets: GND NetC72_1
net class D25_Nets: GND NetC52_1
net class D26_Nets: GND NetC62_1
net class D27_Nets: GND NetC67_1
net class D28_Nets: GND NetC72_1
net class DIR_BUS[1..4]: DIR_BUS1 DIR_BUS2 DIR_BUS3 DIR_BUS4
net class EN_BUS[1..4]: EN_BUS1 EN_BUS2 EN_BUS3 EN_BUS4
net class M2_Nets: NetC52_1 NetC62_1 NetC67_1 NetC72_1
net class M3_Nets: NetC52_1 NetC62_1 NetC67_1 NetC72_1
net class MOD0E_BUS[1..4]: MOD0E_BUS1 MOD0E_BUS2 MOD0E_BUS3 MOD0E_BUS4
net class MOD1E_BUS[1..4]: MOD1E_BUS1 MOD1E_BUS2 MOD1E_BUS3 MOD1E_BUS4
net class MOD2E_BUS[1..4]: MOD2E_BUS1 MOD2E_BUS2 MOD2E_BUS3 MOD2E_BUS4
net class R36_Nets: +12VCC1 NetC35_2
net class R37_Nets: NetC51_2 REF_Z
net class R38_Nets: GND NetR38_2
net class R39_Nets: GND NetR39_2
net class REF_BUS[1..4]: REF_BUS1 REF_BUS2 REF_BUS3 REF_BUS4
net class STEP_BUS[1..4]: STEP_BUS1 STEP_BUS2 STEP_BUS3 STEP_BUS4
net class TP15_Nets: REF_Z
net class TP16_Nets: EN_Z
net class TP17_Nets: MOD2E_Z
net class TP18_Nets: MOD1E_Z
net class TP19_Nets: MOD0E_Z
net class TP20_Nets: DIR_Z
net class TP21_Nets: STEP_Z
net class P6_Nets: 3.3VCC DIR_EXP1 DIR_EXP2 EN_EXP1 EN_EXP2 GND MODE0_EXP1 MODE0_EXP2 MODE1_EXP1 MODE1_EXP2 MODE2_EXP1 MODE2_EXP2 REF_EXP1 REF_EXP2 STEP_EXP1 STEP_EXP2
net class P5_Nets: 3.3VCC EXP_CS2 GND I2C_SCL I2C_SDA MCCDZ MCCK MCDZ0 MCDZ1 MCDZ2 MCDZ3 MISO MOSI RXD0 SCLK TXD0
differential pair UMCU: +UMCU_P -UMCU_N
differential pair UI: +UI_P -UI_N
differential pair UD: +UD_P -UD_N
differential pair R: +R_P -R_N

## Components (designator, comment, footprint, x,y, rotation, side; value= is the part's Value field where it differs from the comment)
C1_ES1 "0402" C0402 3200,1525 r180 top (schematic designator C1)
C1_ES2 "0402" C0402 4035,1525 r180 top (schematic designator C1)
C1_ES3 "0402" C0402 3620,1525 r180 top (schematic designator C1)
C2_ES1 "0402" C0402 2895,1525 r0 top (schematic designator C2)
C2_ES2 "0402" C0402 3725,1525 r0 top (schematic designator C2)
C2_ES3 "0402" C0402 3310,1525 r0 top (schematic designator C2)
C3_M1 "10uF" C0603 288,391 r180 top (schematic designator C3)
C3_M2 "10uF" C0603 983,391 r180 top (schematic designator C3)
C3_M3 "10uF" C0603 2373,391 r180 top (schematic designator C3)
C3_M4 "10uF" C0603 3068,391 r180 top (schematic designator C3)
C4 "0603" 1608[0603] 2870,2865 r90 top
C5_M1 "10uF" C0603 388,391 r180 top (schematic designator C5)
C5_M2 "10uF" C0603 1083,391 r180 top (schematic designator C5)
C5_M3 "10uF" C0603 2473,391 r180 top (schematic designator C5)
C5_M4 "10uF" C0603 3168,391 r180 top (schematic designator C5)
C6_M1 "10uF" C0603 612,390 r0 top (schematic designator C6)
C6_M2 "10uF" C0603 1307,390 r0 top (schematic designator C6)
C6_M3 "10uF" C0603 2697,390 r0 top (schematic designator C6)
C6_M4 "10uF" C0603 3392,390 r0 top (schematic designator C6)
C7 "470uF" C12,5-5 3815,620 r315 top
C8_M1 "10uF" C0603 512,390 r0 top (schematic designator C8)
C8_M2 "10uF" C0603 1207,390 r0 top (schematic designator C8)
C8_M3 "10uF" C0603 2597,390 r0 top (schematic designator C8)
C8_M4 "10uF" C0603 3292,390 r0 top (schematic designator C8)
C9 "4.7uF" C1206 3081.31,3342.43 r0 top
C10 "1uF" C0805 2950.31,3327.43 r90 top
C11 "100nF" C0603 3305.31,3420.43 r0 top
C12_M1 "0402" C0402 565,1148 r270 top (schematic designator C12)
C12_M2 "0402" C0402 1260,1148 r270 top (schematic designator C12)
C12_M3 "0402" C0402 2650,1148 r270 top (schematic designator C12)
C12_M4 "0402" C0402 3345,1148 r270 top (schematic designator C12)
C13 "0603" C0603 1420,1696.1 r270 top
C14_M1 "0402" C0402 604,1148 r270 top (schematic designator C14)
C14_M2 "0402" C0402 1299,1148 r270 top (schematic designator C14)
C14_M3 "0402" C0402 2689,1148 r270 top (schematic designator C14)
C14_M4 "0402" C0402 3384,1148 r270 top (schematic designator C14)
C15 "100uF" C3,5-8 2575,3865 r180 top
C16 "100uF" C3,5-8 2725,3305 r225 top
C17 "0603" C0603 2575,2920 r270 top
C18 "100uF" C3,5-8 3560,2815 r0 top
C19 "0402" C0402 3835,2285 r270 top
C20 "0402" C0402 2530,2930 r270 top
C21 "10uF" C0805 3281.31,3348.43 r180 top
C22 "1uF" C0402 3026.31,3125.43 r0 top
C23 "0402" C0402 2141.1,1601.1 r90 top
C24 "0402" C0402 360,2175 r90 top
C25 "0603" C0603 2565,2715 r90 top
C26 "0402" C0402 2520,2705 r90 top
C27 "0402" C0402 1375,1685 r270 top
C28 "0603" C0603 1245,2225 r270 top
C29 "0603" C0603 2305,1435 r180 top
C30_TR1 "0402" C0402 3905,2215 r90 top (schematic designator C30)
C30_TR2 "0402" C0402 3570,2215 r90 top (schematic designator C30)
C31_TC1 "0402" C0402 3400,2355 r180 top (schematic designator C31)
C31_TC2 "0402" C0402 3085,2355 r180 top (schematic designator C31)
C32 "0603" C0603 1575,2755 r180 top
C33 "0402" C0402 1565,2710 r180 top
C34 "0402" C0402 2300,1475 r180 top
C35 "0603" 1608[0603] 1586.26,689.74 r90 top
C36 "0603" C0603 1315,2130 r270 top
C37 "0402" C0402 1270,2120 r270 top
C38 "0402" C0402 2055,2685 r270 top
C39 "0402" C0402 2430,2105 r270 top
C40 "100nF" C0603 3317.31,3253.43 r270 top
C41 "0402" C0402 1375,2300 r90 top
C42 "0402" C0402 1270,1960 r90 top
C43 "0603" 1608[0603] 1310,2755 r180 top
C44 "0603" 1608[0603] 1410,2755 r0 top
C45 "0402" C0402 2181.1,1601.1 r90 top
C46 "0402" C0402 2370,2125 r270 top
C47 "0402" C0402 2005,2635 r0 top
C48 "0402" C0402 1335,1935 r90 top
C49 "0402" C0402 1526.26,704.74 r270 top
C50 "0402" C0402 2036.26,1149.74 r270 top
C51 "0402" C0402 2086.26,709.74 r270 top
C52 "10uF" C0603 1676.26,389.74 r180 top
C53 "0402" C0402 1290,2215 r270 top
C54 "0402" C0402 1160,2095 r270 top
C55 "0603" C0603 1115,2105 r270 top
C56 "0402" C0402 1200,2755 r270 top
C57 "0402" C0402 1160,2795 r90 top
C58 "0402" C0402 650,2805 r90 top
C59 "0402" C0402 650,2735 r270 top
C60 "0603" C0603 1265,2335 r270 top
C61 "0402" C0402 1220,2315 r270 top
C62 "10uF" C0603 1776.26,389.74 r180 top
C63 "Cap Semi" 1608[0603] 340,3180 r90 top
C64 "0402" C0402 1465,1555 r0 top
C65 "0402" C0402 1480,1645 r0 top
C66_M1 "0603" 1608[0603] 194,694 r90 top (schematic designator C66)
C66_M2 "0603" 1608[0603] 889,694 r90 top (schematic designator C66)
C66_M3 "0603" 1608[0603] 2279,694 r90 top (schematic designator C66)
C66_M4 "0603" 1608[0603] 2974,694 r90 top (schematic designator C66)
C67 "10uF" C0603 2006.26,389.74 r0 top
C68_M1 "0402" C0402 140,705 r270 top (schematic designator C68)
C68_M2 "0402" C0402 835,705 r270 top (schematic designator C68)
C68_M3 "0402" C0402 2225,705 r270 top (schematic designator C68)
C68_M4 "0402" C0402 2920,705 r270 top (schematic designator C68)
C69 "0402" C0402 1956.26,1149.74 r270 top
C70 "0402" C0402 1996.26,1149.74 r270 top
C71_M1 "0402" C0402 643,1148 r270 top (schematic designator C71)
C71_M2 "0402" C0402 1338,1148 r270 top (schematic designator C71)
C71_M3 "0402" C0402 2728,1148 r270 top (schematic designator C71)
C71_M4 "0402" C0402 3423,1148 r270 top (schematic designator C71)
C72 "10uF" C0603 1901.26,389.74 r0 top
C73 "0603" 1608[0603] 1240,2465 r0 top
C75_M1 "0402" C0402 693,709 r270 top (schematic designator C75)
C75_M2 "0402" C0402 1388,709 r270 top (schematic designator C75)
C75_M3 "0402" C0402 2778,709 r270 top (schematic designator C75)
C75_M4 "0402" C0402 3473,709 r270 top (schematic designator C75)
D1 "SZMM3Z4V7T1G" SZMM3Z4V7T1G 3485,2180 r90 top
D2 "SK310A-TP" SMA-SM 3484.31,3035.43 r180 top
D3_TR1 "Diode 1N4148" 1N4148WT 4030,2215 r270 top (schematic designator D3)
D3_TR2 "Diode 1N4148" 1N4148WT 3695,2215 r270 top (schematic designator D3)
D4 "SK310A-TP" SK310A-TP 2805,3855 r90 top
D5_TR1 "Diode 1N4148" 1N4148WT 3965,2215 r90 top (schematic designator D5)
D5_TR2 "Diode 1N4148" 1N4148WT 3630,2215 r90 top (schematic designator D5)
D6 "SK310A-TP" SK310A-TP 2805,3585 r270 top
D7 "5988110107F" LED2012120 3088.76,3440.43 r180 top
D8 "RSB39VTE-17" SOD323-R 455,2195 r90 top
D9 "5988110107F" LED2012120 3285,2885 r90 top
D10 "5988140107F" LED2012120 524,3401 r0 top
D11 "5988140107F" LED2012120 655,3450 r270 top
D12 "B240A-13-F" SK310A-TP 955,3525 r180 top
D13 "5988140107F" LED2012120 875,3265 r270 top
D14 "5988140107F" LED2012120 1275,3265 r270 top
D15 "B240A-13-F" SK310A-TP 1355,3525 r180 top
D16 "5988140107F" LED2012120 1675,3265 r270 top
D17 "B240A-13-F" SK310A-TP 1755,3525 r180 top
D18 "5988140107F" LED2012120 2080,3245 r270 top
D19 "B240A-13-F" SK310A-TP 2160,3525 r180 top
D20_M1 "SMAJ30A" SMA-SM 245,480 r0 top (schematic designator D20)
D20_M2 "SMAJ30A" SMA-SM 940,480 r0 top (schematic designator D20)
D20_M3 "SMAJ30A" SMA-SM 2330,480 r0 top (schematic designator D20)
D20_M4 "SMAJ30A" SMA-SM 3025,480 r0 top (schematic designator D20)
D21_M1 "SMAJ30A" SMA-SM 325,595 r0 top (schematic designator D21)
D21_M2 "SMAJ30A" SMA-SM 1020,595 r0 top (schematic designator D21)
D21_M3 "SMAJ30A" SMA-SM 2410,595 r0 top (schematic designator D21)
D21_M4 "SMAJ30A" SMA-SM 3105,595 r0 top (schematic designator D21)
D22_M1 "SMAJ30A" SMA-SM 660,480 r180 top (schematic designator D22)
D22_M2 "SMAJ30A" SMA-SM 1355,480 r180 top (schematic designator D22)
D22_M3 "SMAJ30A" SMA-SM 2745,480 r180 top (schematic designator D22)
D22_M4 "SMAJ30A" SMA-SM 3440,480 r180 top (schematic designator D22)
D23_M1 "SMAJ30A" SMA-SM 575,595 r180 top (schematic designator D23)
D23_M2 "SMAJ30A" SMA-SM 1270,595 r180 top (schematic designator D23)
D23_M3 "SMAJ30A" SMA-SM 2660,595 r180 top (schematic designator D23)
D23_M4 "SMAJ30A" SMA-SM 3355,595 r180 top (schematic designator D23)
D24 "5988140107F" LED2012120 145,2830 r180 top
D25 "SMAJ30A" SMA-SM 1636.26,479.74 r0 top
D26 "SMAJ30A" SMA-SM 1714.03,594.74 r0 top
D27 "SMAJ30A" SMA-SM 2051.26,479.74 r180 top
D28 "SMAJ30A" SMA-SM 1966.26,594.74 r180 top
D29 "5988140107F" LED2012120 145,2775 r180 top
DA1 "PESDxL2BT" SOT95P230X110-3N 3050,1495 r270 top
DA2 "PESDxL2BT" SOT95P230X110-3N 3880,1500 r270 top
DA3 "PESDxL2BT" SOT95P230X110-3N 3465,1500 r270 top
DA4 "PESDxL2BT" SOT95P230X110-3N 480.88,2550 r0 top
DA5 "PESDxL2BT" SOT95P230X110-3N 3800,2215 r90 top
F1 "3522-2" "3522-2 - WAVE SOLDER" 3280,3575 r180 top
F2 "3522-2" "3522-2 - WAVE SOLDER" 3280,3835 r180 top
FAN-1 "Molex 70543-02" 70543-02 180,3535 r180 top
FB1 "BLM15HG601SN1D" BLM18PG121SN1D 3760,2300 r90 top
FB4 "BLM15HG601SN1D" BLM18PG121SN1D 1575,2805 r180 top
FB5 "BLM15HG601SN1D" BLM18PG121SN1D 1070,2105 r270 top
FB6 "BLM15HG601SN1D" BLM18PG121SN1D 1330,1695 r270 top
FB7 "BLM15HG601SN1D" BLM18PG121SN1D 1200,2225 r270 top
FB8 "BLM15HG601SN1D" BLM18PG121SN1D 1185,2325 r270 top
FB9 "BLM15HG601SN1D" BLM18PG121SN1D 1475,1600 r0 top
FD1 "FIDUCIAL" FIDUCIAL-1X2 70,3980 r90 top
FD2 "FIDUCIAL" FIDUCIAL-1X2 4030,70 r0 top
FD3 "FIDUCIAL" FIDUCIAL-1X2 70,70 r270 top
H1 "Hole" Wave_hole_3x7-singleSided#1 3903.15,196.85 r0 top locked
H2 "Hole" Wave_hole_3x7-singleSided#2 196.85,196.85 r0 top locked
H3 "Hole" Wave_hole_3x7-singleSided#2 196.85,3853.15 r0 top locked
H4 "Hole" Wave_hole_3x7-singleSided#2 3903.15,3853.15 r0 top locked
"Heat Power" "con-phoenix-508 - 4" MSTBV4 3880,3270 r270 top
JTAG/DEBUG "FTSH-105-XX-X-DV" FTSH-105-XX-X-DV 1765,2825 r0 top
L1 "XAL5050-153MEB" XAL50xx-153 3484.31,3261.43 r90 top
LOGO1 "OSHW_LOGO_8MILX0150-NT" OSHW_8X150_NOTEXT 3775,2680 r0 top
M1_M1 "Molex 0705430003" 4POL254 605,145 r180 top (schematic designator M1)
M1_M2 "Molex 0705430003" 4POL254 1195,145 r180 top (schematic designator M1)
M1_M3 "Molex 0705430003" 4POL254 2900,145 r180 top (schematic designator M1)
M1_M4 "Molex 0705430003" 4POL254 3495,145 r180 top (schematic designator M1)
M2 "Molex 0705430003" 4POL254 2310,145 r180 top
M3 "Molex 0705430003" 4POL254 1790,145 r180 top
MAX1_ES1 "Molex 70543-03" 70543-03 3050,1720 r0 top (schematic designator MAX1)
MAX1_ES2 "Molex 70543-03" 70543-03 3880,1720 r0 top (schematic designator MAX1)
MAX1_ES3 "Molex 70543-03" 70543-03 3465,1720 r0 top (schematic designator MAX1)
MIN1_ES1 "Molex 70543-03" 70543-03 3050,1960 r180 top (schematic designator MIN1)
MIN1_ES2 "Molex 70543-03" 70543-03 3880,1960 r180 top (schematic designator MIN1)
MIN1_ES3 "Molex 70543-03" 70543-03 3465,1960 r180 top (schematic designator MIN1)
"Motor Power" "con-phoenix-508 - 2" "MSTBV2 - duplicate" 3890,940 r270 top
P1 "ERASE" HDR1X2 2420,1565 r0 top
P2_TR1 "Molex 70543-02" 70543-02 3925,2500 r180 top (schematic designator P2)
P2_TR2 "Molex 70543-02" 70543-02 3610,2500 r180 top (schematic designator P2)
P3 "Header 5X2" HDR2X5 2030,2820 r0 top
P5 "302-S161" 302-S161 200,1540 r0 top
P6 "302-S161" 302-S161 200,1915 r0 top
Q2 "IRML6346TRPBF" IRLML6346 415,3510 r180 top
Q3 "IRML6346TRPBF" IRLML6346 761,3561 r90 top
Q4 "PSMN7R0-60YS" PSMN7R0-60YS 1021.5,3312.03 r90 top
Q5 "PSMN7R0-60YS" PSMN7R0-60YS 1420,3311.64 r90 top
Q6 "PSMN7R0-60YS" PSMN7R0-60YS 1821,3311.22 r90 top
Q7 "PSMN7R0-60YS" PSMN7R0-60YS 2226,3311.22 r90 top
R1 "Res3" J1-0603 3485,2295 r90 top
R2_ES1 "2.7K" R0402 3200,1485 r180 top (schematic designator R2)
R2_ES2 "2.7K" R0402 4035,1485 r180 top (schematic designator R2)
R2_ES3 "2.7K" R0402 3620,1485 r180 top (schematic designator R2)
R3_ES1 "2.7K" R0402 2895,1485 r0 top (schematic designator R3)
R3_ES2 "2.7K" R0402 3725,1485 r0 top (schematic designator R3)
R3_ES3 "2.7K" R0402 3310,1485 r0 top (schematic designator R3)
R4 "0603" J1-0603 1330,2250 r90 top
R5 "0603" J1-0603 1350,2515 r90 top
R6 "100K" R0603 1220,2130 r90 top
R7 "10K" R0603 2957.31,3157.43 r270 top
R8 "1K" R0603 3208.76,3440.43 r0 top
R9 "0.6r" 2512R-0.55 3209.31,3037.43 r0 top
R10 "10K" R0603 3041.31,3033.43 r90 top
R11 "1K" R0603 3285,2735 r270 top
R12 "10K" R0603 2978.31,3033.43 r270 top
R13 "1.8K" R0603 394,3401 r180 top
R14_TR1 "Res3" J1-0603 4030,2325 r90 top (schematic designator R14)
R14_TR2 "Res3" J1-0603 3695,2325 r90 top (schematic designator R14)
R15 "0603" J1-0603 1200,2525 r180 top
R16 "0603" J1-0603 1200,2575 r180 top
R17 "200K" R0402 2950.31,3233.43 r180 top
R18 "0603" J1-0603 610,2575 r180 top
R19_TR1 "Res3" J1-0603 3965,2325 r270 top (schematic designator R19)
R19_TR2 "Res3" J1-0603 3630,2325 r270 top (schematic designator R19)
R20 "0603" J1-0603 610,2525 r180 top
R21 "Res3" J1-0603 291,3179 r270 top
R22 "0603" J1-0603 1350,2416.54 r270 top
R23 "0603" J1-0603 1240,2416.54 r0 top
R24 "1M" R0402 405,2175 r90 top
R25 "1K" R0603 270,2830 r180 top
R26 "1K" R0603 270,2775 r180 top
R30_M1 "1M" R0402 238,704 r270 top (schematic designator R30)
R30_M2 "1M" R0402 933,704 r270 top (schematic designator R30)
R30_M3 "1M" R0402 2323,704 r270 top (schematic designator R30)
R30_M4 "1M" R0402 3018,704 r270 top (schematic designator R30)
R31_M1 "0603" J1-0603 739,719 r90 top (schematic designator R31)
R31_M2 "0603" J1-0603 1434,719 r90 top (schematic designator R31)
R31_M3 "0603" J1-0603 2824,719 r90 top (schematic designator R31)
R31_M4 "0603" J1-0603 3519,719 r90 top (schematic designator R31)
R32_M1 "2512" Resistor2512 725,939.74 r270 top (schematic designator R32)
R32_M2 "2512" Resistor2512 1420,939.74 r270 top (schematic designator R32)
R32_M3 "2512" Resistor2512 2810,939.74 r270 top (schematic designator R32)
R32_M4 "2512" Resistor2512 3505,939.74 r270 top (schematic designator R32)
R33_M1 "2512" Resistor2512 175,939.74 r270 top (schematic designator R33)
R33_M2 "2512" Resistor2512 870,939.74 r270 top (schematic designator R33)
R33_M3 "2512" Resistor2512 2260,940 r270 top (schematic designator R33)
R33_M4 "2512" Resistor2512 2955,939.74 r270 top (schematic designator R33)
R36 "1M" R0402 1631.26,704.74 r270 top
R37 "0603" J1-0603 2131.26,719.74 r90 top
R38 "2512" Resistor2512 2115.26,939.74 r270 top
R39 "2512" Resistor2512 1564.26,939.74 r270 top
R45 "10r" R0603 545,3470 r180 top
R46 "100K" R0603 545,3555 r180 top
R47 "1.8K" R0603 652,3572 r90 top
R52 "10r" R0603 716,3426 r90 top
R55 "100K" R0603 806,3426 r90 top
R56 "1.8K" R0603 875,3383.64 r90 top
R58 "10r" R0603 1156,3214 r90 top
R59 "100K" R0603 1133,3136 r180 top
R60 "1.8K" R0603 1275,3385 r90 top
R62 "10r" R0603 1556,3215 r90 top
R63 "100K" R0603 1533,3137 r180 top
R64 "1.8K" R0603 1675,3385 r90 top
R66 "10r" R0603 1956,3215 r90 top
R67 "100K" R0603 1934,3137 r180 top
R68 "1.8K" R0603 2080,3385 r90 top
R70 "10r" R0603 2361,3215 r90 top
R71 "100K" R0603 2339,3137 r180 top
S1 "1571610-2" B3F-31XX 145,3135 r270 top locked
T1 "Molex 0395311010" MSTBV10 1380,3835 r0 top
T2_TC1 "Molex 70543-02" 70543-02 3295,2500 r180 top (schematic designator T2)
T2_TC2 "Molex 70543-02" 70543-02 2980,2500 r180 top (schematic designator T2)
TP1 "TP4" TP-2#1 3585,3275 r90 top
TP2 "TP4" TP-2#1 3520,2150 r180 top
TP3 "TP4" TP-2#2 3465,2900 r270 bottom
TP4 "TP4" TP-2#1 2995,2270 r180 top
TP5 "TP4" TP-2#1 2765,2250 r180 top
TP6 "TP4" TP-2#1 3075,2325 r90 top
TP7 "TP4" TP-2#1 2375,2735 r90 top
TP8 "TP4" TP-2#1 2275,2730 r90 top
TP9_ES1 "TP4" TP-2#2 3150,2080 r270 bottom (schematic designator TP9)
TP9_ES2 "TP4" TP-2#2 3980,2080 r270 bottom (schematic designator TP9)
TP9_ES3 "TP4" TP-2#2 3565,2065 r270 bottom (schematic designator TP9)
TP10_ES1 "TP4" TP-2#2 2950,1840 r270 bottom (schematic designator TP10)
TP10_ES2 "TP4" TP-2#2 3780,1840 r270 bottom (schematic designator TP10)
TP10_ES3 "TP4" TP-2#2 3365,1840 r270 bottom (schematic designator TP10)
TP11 "TP4" TP-2#2 1080,3665 r270 bottom
TP12 "TP4" TP-2#2 1481,3666 r90 bottom
TP13 "TP4" TP-2#2 1881,3666 r270 bottom
TP14 "TP4" TP-2#2 2281,3666 r270 bottom
TP15 "TP4" TP-2#1 2201.26,1228.74 r180 top
TP16 "TP4" TP-2#1 1871.26,1234.74 r180 top
TP17 "TP4" TP-2#1 1711.26,1239.74 r90 top
TP18 "TP4" TP-2#1 1751.26,1174.74 r90 top
TP19 "TP4" TP-2#1 1791.26,1234.74 r90 top
TP20 "TP4" TP-2#1 1911.26,1174.74 r90 top
TP21 "TP4" TP-2#1 1831.26,1174.74 r90 top
TP32_M1 "TP4" TP-2#1 481.23,1245.77 r180 top (schematic designator TP32)
TP32_M2 "TP4" TP-2#1 1176.23,1245.77 r180 top (schematic designator TP32)
TP32_M3 "TP4" TP-2#1 2566.23,1245.77 r180 top (schematic designator TP32)
TP32_M4 "TP4" TP-2#1 3261.23,1245.77 r180 top (schematic designator TP32)
TP33_M1 "TP4" TP-2#1 811.26,1228.74 r180 top (schematic designator TP33)
TP33_M2 "TP4" TP-2#1 1506.26,1228.74 r180 top (schematic designator TP33)
TP33_M3 "TP4" TP-2#1 2865,1230 r180 top (schematic designator TP33)
TP33_M4 "TP4" TP-2#1 3526.26,1228.74 r180 top (schematic designator TP33)
TP35_M1 "TP4" TP-2#1 321.23,1245.77 r180 top (schematic designator TP35)
TP35_M2 "TP4" TP-2#1 1016.23,1245.77 r180 top (schematic designator TP35)
TP35_M3 "TP4" TP-2#1 2406.23,1245.77 r180 top (schematic designator TP35)
TP35_M4 "TP4" TP-2#1 3101.23,1245.77 r180 top (schematic designator TP35)
TP36_M1 "TP4" TP-2#1 361.23,1185.77 r180 top (schematic designator TP36)
TP36_M2 "TP4" TP-2#1 1056.23,1185.77 r180 top (schematic designator TP36)
TP36_M3 "TP4" TP-2#1 2446.23,1185.77 r180 top (schematic designator TP36)
TP36_M4 "TP4" TP-2#1 3141.23,1185.77 r180 top (schematic designator TP36)
TP37_M1 "TP4" TP-2#1 401.23,1245.77 r180 top (schematic designator TP37)
TP37_M2 "TP4" TP-2#1 1096.23,1245.77 r180 top (schematic designator TP37)
TP37_M3 "TP4" TP-2#1 2486.23,1245.77 r180 top (schematic designator TP37)
TP37_M4 "TP4" TP-2#1 3181.23,1245.77 r180 top (schematic designator TP37)
TP38 "TP4" TP-2#2 2860,2495 r270 bottom
TP39_M1 "TP4" TP-2#1 521.23,1185.77 r180 top (schematic designator TP39)
TP39_M2 "TP4" TP-2#1 1216.23,1185.77 r180 top (schematic designator TP39)
TP39_M3 "TP4" TP-2#1 2606.23,1185.77 r180 top (schematic designator TP39)
TP39_M4 "TP4" TP-2#1 3301.23,1185.77 r180 top (schematic designator TP39)
TP40_M1 "TP4" TP-2#1 441.23,1185.77 r180 top (schematic designator TP40)
TP40_M2 "TP4" TP-2#1 1136.23,1185.77 r180 top (schematic designator TP40)
TP40_M3 "TP4" TP-2#1 2526.23,1185.77 r180 top (schematic designator TP40)
TP40_M4 "TP4" TP-2#1 3221.23,1185.77 r180 top (schematic designator TP40)
TP41 "TP4" TP-2#2 610,3300 r0 bottom
TP42 "TP4" TP-2#1 805,3320 r180 top
TP43 "TP4" TP-2#2 2665,2555 r270 bottom
TP44 "TP4" TP-2#2 2701.1,2496.1 r270 bottom
TP45 "TP4" TP-2#2 2740,2555 r270 bottom
TP46 "TP4" TP-2#2 2780,2495 r270 bottom
TP47 "TP4" TP-2#2 2820,2555 r270 bottom
TP48 "TP4" TP-2#1 1160,3040 r90 top
TP49 "TP4" TP-2#1 1560,3055 r90 top
TP50 "TP4" TP-2#1 1960,3045 r90 top
TP51 "TP4" TP-2#1 2450,3120 r90 top
TP52_TR1 "TP4" TP-2#1 3840,2085 r180 top (schematic designator TP52)
TP52_TR2 "TP4" TP-2#1 3760,2090 r180 top (schematic designator TP52)
U1 "LM25011MY/NOPB" VSSOP10 3119.31,3224.43 r0 top
U2 "MIC5209-3.3YS" SOT230P700X190-4N 3075,2800 r0 top
U3 "ATML-ATSAM3X-LQFP-144" LQFP144_N 1885,2131.1 r270 top locked
U4_TC1 "MAX31855EASA+" MAXM-S8+4_N 3290,2225 r180 top (schematic designator U4)
U4_TC2 "MAX31855EASA+" MAXM-S8+4_N 2975,2225 r180 top (schematic designator U4)
U5 "DRV8825" DRV8825 1840.26,939 r90 top
U6 "ADuM4160" ADuM4160 905,2650 r0 top
U7_M1 "DRV8825" DRV8825 450,939 r90 top (schematic designator U7)
U7_M2 "DRV8825" DRV8825 1145,939 r90 top (schematic designator U7)
U7_M3 "DRV8825" DRV8825 2535,939 r90 top (schematic designator U7)
U7_M4 "DRV8825" DRV8825 3230,939 r90 top (schematic designator U7)
U8 "TXB0106 Level Shifter" TSOP65P640X120-16N 2713,2817.44 r90 top
U9 "S25FL216K0PMFI041" S25FL216K0PMFI041 2110,1360 r0 top
USB "USB-B" PN61729 108,2374.94 r270 top locked
X2 "445C35A12M00000" 445C35A12M00000 1300,2860 r0 top

## Footprints (in the part's own frame and the unit in brackets; to place one, negate y for a bottom-side part, rotate by r counter-clockwise, add the part's x,y. Pads: shape width x height; smd on the part's side, far side on the other; paste and mask are expansions set on the pad)
1N4148WT [mm] "Molded Diode, 2-Leads, Body 1.20x0.80mm, IPC Medium Density"
  rect 1x0.3 smd: 1(-0.675,0) 2(0.675,0)
  silkscreen extent -0.7,-0.5 1.15,0.55, body extent -0.65,-0.45 0.65,0.45, height 0.7
4POL254 [mil]
  oval 60x120 hole 40: 1(-150,0) 2(-50,0) 3(50,0) 4(150,0)
  silkscreen extent -250,-150 250,113, body extent -250,-150 250,113, height 454
302-S161 [mm] "2.54mm pitch 2X8 1 Pin Shrouded Connector"
  rect 1.5x1.5 hole 0.9: 1(0,-2.54)
  round 1.5 hole 0.9: 2(0,0) 3(2.54,-2.54) 4(2.54,0) 5(5.08,-2.54) 6(5.08,0) 7(7.62,-2.54) 8(7.62,0) 9(10.16,-2.54) 10(10.16,0) 11(12.7,-2.54) 12(12.7,0) 13(15.24,-2.54) 14(15.24,0) 15(17.78,-2.54) 16(17.78,0)
  silkscreen extent -5.08,-5.82 22.86,3.28, body extent -5.08,-5.84 22.86,3.3, height 9.1
445C35A12M00000 [mm] "Crystal Oscillator"
  rect 1.8x2.4 smd: 1(0,0) 2(3.8,0)
  silkscreen extent -1.65,-1.91 5.46,1.91, body extent -1.27,-1.52 5.08,1.52, height 1
1608[0603] [mm] "Chip Capacitor, Body 1.6x0.8mm, IPC High Density"
  rect 0.8x0.9 smd: 1(-0.7,0) 2(0.7,0)
  body extent -0.87,-0.48 0.87,0.48, height 1.3
2512R-0.55 [mm] "2512 Resistor 6.35mm x 3.2mm x 0.55mm"
  rect 0.9x3.3 smd: 1(-2.95,0) 2(2.95,0)
  silkscreen extent -2.1,-1.55 2.1,1.55, body extent -3.22,-1.68 3.22,1.68, height 0.65
"3522-2 - WAVE SOLDER" [mil]
  oct 140x200 hole 100: 1(-280,0) 1(-80,0) 2(80,0) 2(280,0)
  silkscreen extent -400,-100 400,100, body extent -402,-103 402,103, height 709
70543-02 [mil]
  oval 60x120 hole 40: 1(-50,0) 2(50,0)
  silkscreen extent -150,-150 150,113, body extent -150,-150 150,113, height 450
70543-03 [mil]
  oval 60x120 hole 40: 1(-100,0) 2(0,0) 3(100,0)
  silkscreen extent -200,-150 200,113, body extent -200,-150 200,113, height 450
ADuM4160 [mm] "SOIC, 16-Leads, Body 10.30x7.50mm, Pitch 1.27mm, IPC Medium Density"
  oval 2.3x0.6 smd: 1(-4.575,4.445) 2(-4.575,3.175) 3(-4.575,1.905) 4(-4.575,0.635) 5(-4.575,-0.635) 6(-4.575,-1.905) 7(-4.575,-3.175) 8(-4.575,-4.445) 9(4.575,-4.445) 10(4.575,-3.175) 11(4.575,-1.905) 12(4.575,-0.635) 13(4.575,0.635) 14(4.575,1.905) 15(4.575,3.175) 16(4.575,4.445)
  silkscreen extent -4.7,-5.25 3.03,5.42, body extent -3.8,-5.25 3.8,5.25, height 2.65
B3F-31XX [mil]
  oct 70x70 hole 40: 1(-89,-49) 2(89,-49)
  round 100 hole 59: 3(-138,49) 4(138,49)
  silkscreen extent -145,-165 145,10, body extent -165,-200 165,109, height 303
BLM18PG121SN1D [mm]
  rect 0.8x0.6 smd: 1(-0.6,0) 2(0.6,0)
  body extent -0.52,-0.28 0.53,0.27, height 0.6
C3,5-8 [mil]
  round 84 hole 40: 1(-70,0)
  oct 84x84 hole 40: 2(70,0)
  silkscreen extent -160,-160 160,160, body extent -160,-160 160,160, height 512
C12,5-5 [mil]
  round 100 hole 40: 1(-98.43,0) 2(98.43,0)
  silkscreen extent -252,-252 252,252, body extent -252,-252 252,252, height 787
C0402 [mil]
  rrect40% 22x24 smd: 1(-18.7,0) 2(19,0)
  body extent -20,-10 20,10, height 20
C0603 [mm]
  rrect40% 0.74x1 smd: 1(-0.68,0) 2(0.68,0)
  body extent -0.8,-0.4 0.8,0.4, height 0.8
C0805 [mil]
  rrect50% 52x60 smd: 1(-37.4,0) 2(38,0)
  body extent -40,-30 40,30, height 35
C1206 [mm] "Chip Capacitor, Body 3.2x1.6mm, IPC High Density"
  rect 1.1x1.7 smd: 1(-1.35,0) 2(1.35,0)
  silkscreen extent -0.4,-0.75 0.4,0.75, body extent -1.7,-0.9 1.7,0.9, height 1.3
DRV8825 [mm]
  oval 1.7x0.35 smd: 1(-2.85,4.225) 2(-2.85,3.575) 3(-2.85,2.925) 4(-2.85,2.275) 5(-2.85,1.625) 6(-2.85,0.975) 7(-2.85,0.325) 8(-2.85,-0.325) 9(-2.85,-0.975) 10(-2.85,-1.625) 11(-2.85,-2.275) 12(-2.85,-2.925) 13(-2.85,-3.575) 14(-2.85,-4.225) 15(2.85,-4.225) 16(2.85,-3.575) 17(2.85,-2.925) 18(2.85,-2.275) 19(2.85,-1.625) 20(2.85,-0.975) 21(2.85,-0.325) 22(2.85,0.325) 23(2.85,0.975) 24(2.85,1.625) 25(2.85,2.275) 26(2.85,2.925) 27(2.85,3.575) 28(2.85,4.225)
  rect 3.1x5.22 smd: 29(0,0)
  silkscreen extent -2.97,-4.9 1.6,5.07, body extent -2.25,-4.9 2.25,4.9, height 1.2
FIDUCIAL-1X2 [mil]
  rrect100% 40x40 smd paste-3897.64 mask+20: 1(0,0)
  body extent -40,-40 40,40, height 1
FTSH-105-XX-X-DV [mm] "1.27mm pitch, 10 pin, terminal strip; vertical, SMT"
  rect 0.75x2.8 smd mask+0: 1(2.54,2.03) 2(2.54,-2.03) 3(1.27,2.03) 4(1.27,-2.03) 5(0,2.03) 6(0,-2.03) 7(-1.27,2.03) 8(-1.27,-2.03) 9(-2.54,2.03) 10(-2.54,-2.03)
  silkscreen extent 3.28,3.03 3.52,3.27
HDR1X2 [mm] "Connector; Header; 2 Position"
  rect 1.5x1.5 hole 0.9: 1(0,0)
  round 1.5 hole 0.9: 2(2.54,0)
  silkscreen extent -1.27,-1.27 3.81,1.27
HDR2X5 [mm] "Connector; Header; 5x2 Position"
  rect 1.5x1.5 hole 0.9: 1(0,0)
  round 1.5 hole 0.9: 2(0,2.54) 3(2.54,0) 4(2.54,2.54) 5(5.08,0) 6(5.08,2.54) 7(7.62,0) 8(7.62,2.54) 9(10.16,0) 10(10.16,2.54)
  silkscreen extent -1.27,-1.27 11.43,3.81
IRLML6346 [mm] "SOT23, 3-Leads, Body 2.92x2.37mm, Pitch 0.95mm, IPC Medium Density"
  rect 1.6x0.6 smd: 1(-0.9,0.95) 2(-0.9,-0.95) 3(0.9,0)
  silkscreen extent -1.03,-1.5 0.7,1.92, body extent -0.7,-1.52 0.7,1.52, height 1.12
J1-0603 [mm] "Chip Resistor, Body 1.6x0.8mm, IPC High Density"
  rect 0.7x0.9 smd: 1(-0.75,0) 2(0.75,0)
  silkscreen extent -0.2,-0.35 0.2,0.35, body extent -0.85,-0.48 0.85,0.48, height 0.9
LED2012120 [mil]
  rect 48x48 smd: A(-41.34,0) C(42,0)
  silkscreen extent 0,-27 12,27, body extent -50,-25 50,25, height 28
LQFP144_N [mm] "Thin QFP, 144-Leads, Body 20x20mm, Pitch 0.5mm, IPC Medium Density"
  oval 1.8x0.3 smd: 1(-10.55,8.75) 2(-10.55,8.25) 3(-10.55,7.75) 4(-10.55,7.25) 5(-10.55,6.75) 6(-10.55,6.25) 7(-10.55,5.75) 8(-10.55,5.25) 9(-10.55,4.75) 10(-10.55,4.25) 11(-10.55,3.75) 12(-10.55,3.25) 13(-10.55,2.75) 14(-10.55,2.25) 15(-10.55,1.75) 16(-10.55,1.25) 17(-10.55,0.75) 18(-10.55,0.25) 19(-10.55,-0.25) 20(-10.55,-0.75) 21(-10.55,-1.25) 22(-10.55,-1.75) 23(-10.55,-2.25) 24(-10.55,-2.75) 25(-10.55,-3.25) 26(-10.55,-3.75) 27(-10.55,-4.25) 28(-10.55,-4.75) 29(-10.55,-5.25) 30(-10.55,-5.75) 31(-10.55,-6.25) 32(-10.55,-6.75) 33(-10.55,-7.25) 34(-10.55,-7.75) 35(-10.55,-8.25) 36(-10.55,-8.75) 73(10.55,-8.75) 74(10.55,-8.25) 75(10.55,-7.75) 76(10.55,-7.25) 77(10.55,-6.75) 78(10.55,-6.25) 79(10.55,-5.75) 80(10.55,-5.25) 81(10.55,-4.75) 82(10.55,-4.25) 83(10.55,-3.75) 84(10.55,-3.25) 85(10.55,-2.75) 86(10.55,-2.25) 87(10.55,-1.75) 88(10.55,-1.25) 89(10.55,-0.75) 90(10.55,-0.25) 91(10.55,0.25) 92(10.55,0.75) 93(10.55,1.25) 94(10.55,1.75) 95(10.55,2.25) 96(10.55,2.75) 97(10.55,3.25) 98(10.55,3.75) 99(10.55,4.25) 100(10.55,4.75) 101(10.55,5.25) 102(10.55,5.75) 103(10.55,6.25) 104(10.55,6.75) 105(10.55,7.25) 106(10.55,7.75) 107(10.55,8.25) 108(10.55,8.75)
  oval 0.3x1.8 smd: 37(-8.75,-10.55) 38(-8.25,-10.55) 39(-7.75,-10.55) 40(-7.25,-10.55) 41(-6.75,-10.55) 42(-6.25,-10.55) 43(-5.75,-10.55) 44(-5.25,-10.55) 45(-4.75,-10.55) 46(-4.25,-10.55) 47(-3.75,-10.55) 48(-3.25,-10.55) 49(-2.75,-10.55) 50(-2.25,-10.55) 51(-1.75,-10.55) 52(-1.25,-10.55) 53(-0.75,-10.55) 54(-0.25,-10.55) 55(0.25,-10.55) 56(0.75,-10.55) 57(1.25,-10.55) 58(1.75,-10.55) 59(2.25,-10.55) 60(2.75,-10.55) 61(3.25,-10.55) 62(3.75,-10.55) 63(4.25,-10.55) 64(4.75,-10.55) 65(5.25,-10.55) 66(5.75,-10.55) 67(6.25,-10.55) 68(6.75,-10.55) 69(7.25,-10.55) 70(7.75,-10.55) 71(8.25,-10.55) 72(8.75,-10.55) 109(8.75,10.55) 110(8.25,10.55) 111(7.75,10.55) 112(7.25,10.55) 113(6.75,10.55) 114(6.25,10.55) 115(5.75,10.55) 116(5.25,10.55) 117(4.75,10.55) 118(4.25,10.55) 119(3.75,10.55) 120(3.25,10.55) 121(2.75,10.55) 122(2.25,10.55) 123(1.75,10.55) 124(1.25,10.55) 125(0.75,10.55) 126(0.25,10.55) 127(-0.25,10.55) 128(-0.75,10.55) 129(-1.25,10.55) 130(-1.75,10.55) 131(-2.25,10.55) 132(-2.75,10.55) 133(-3.25,10.55) 134(-3.75,10.55) 135(-4.25,10.55) 136(-4.75,10.55) 137(-5.25,10.55) 138(-5.75,10.55) 139(-6.25,10.55) 140(-6.75,10.55) 141(-7.25,10.55) 142(-7.75,10.55) 143(-8.25,10.55) 144(-8.75,10.55)
  silkscreen extent -10.67,-9.25 9.25,9.58, body extent -10,-10 10,10, height 1.6